# Altium PCB BearlyML Module Board.pcbdoc
Units mil, origin at the board's own origin, x right, y up, seen from the top; angles counter-clockwise.
Board outline 5566.92 x 3205.7 mil, 6 copper layers (Top Layer, Mid-Layer 1, Mid-Layer 2, Mid-Layer 3, Mid-Layer 4, Bottom Layer); 63 components, 67 nets, 774 pads, 281 vias.
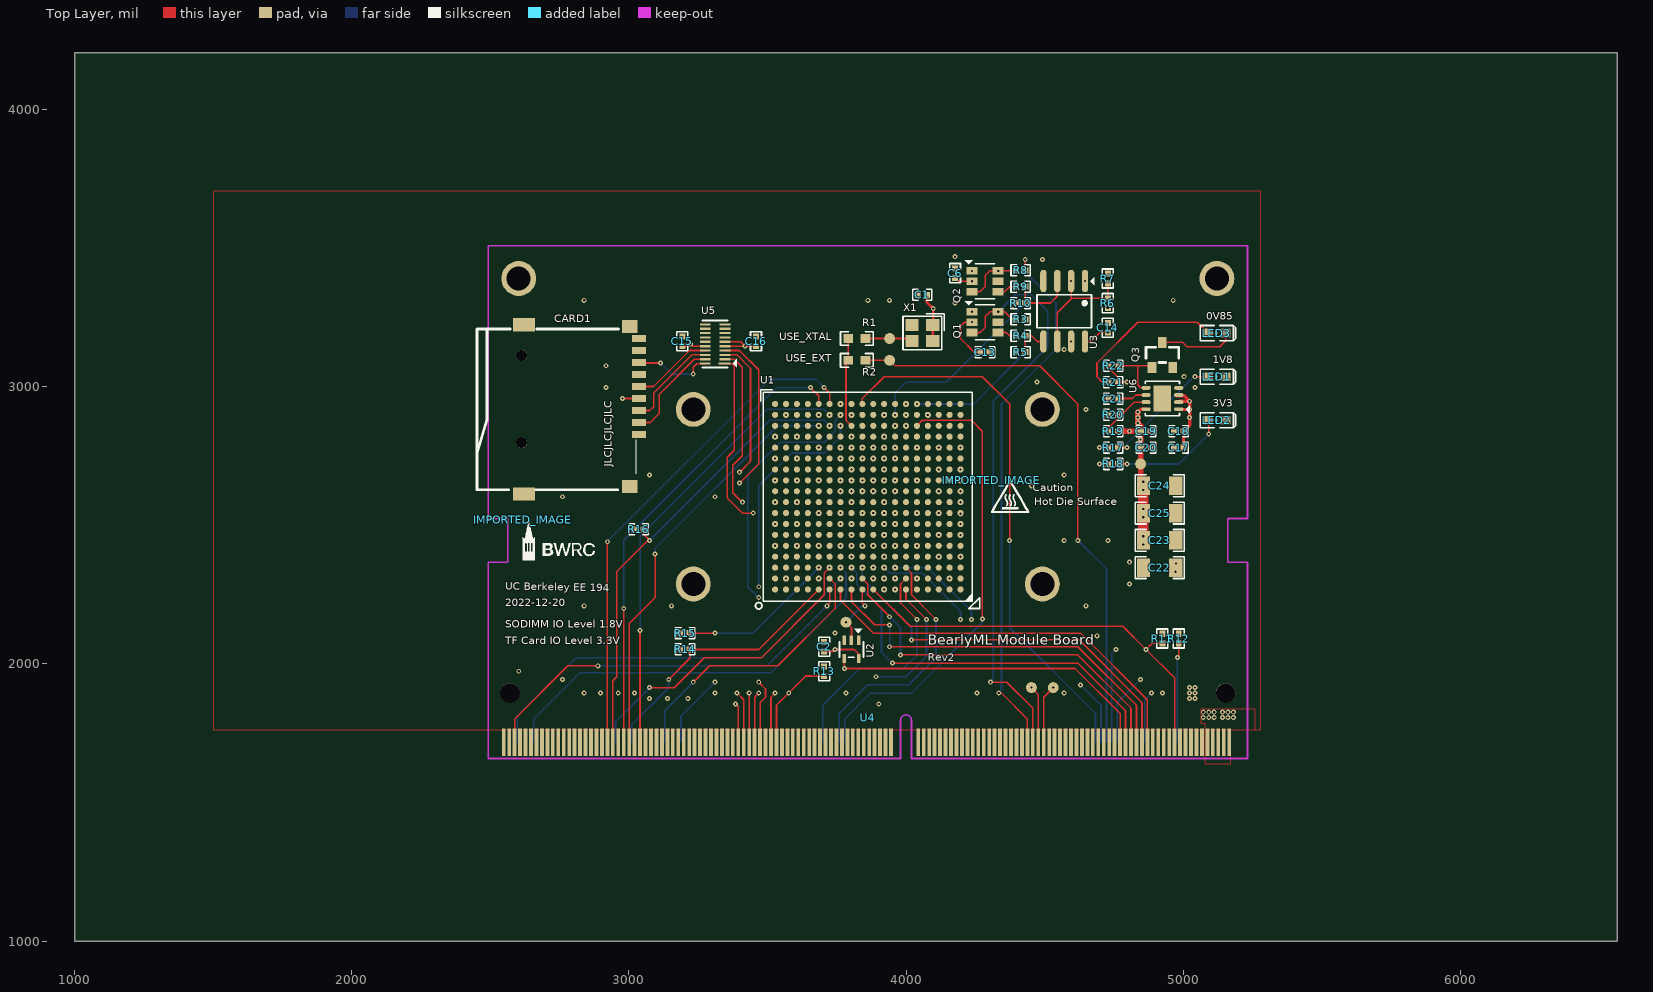
[diagram p0: Top Layer view]
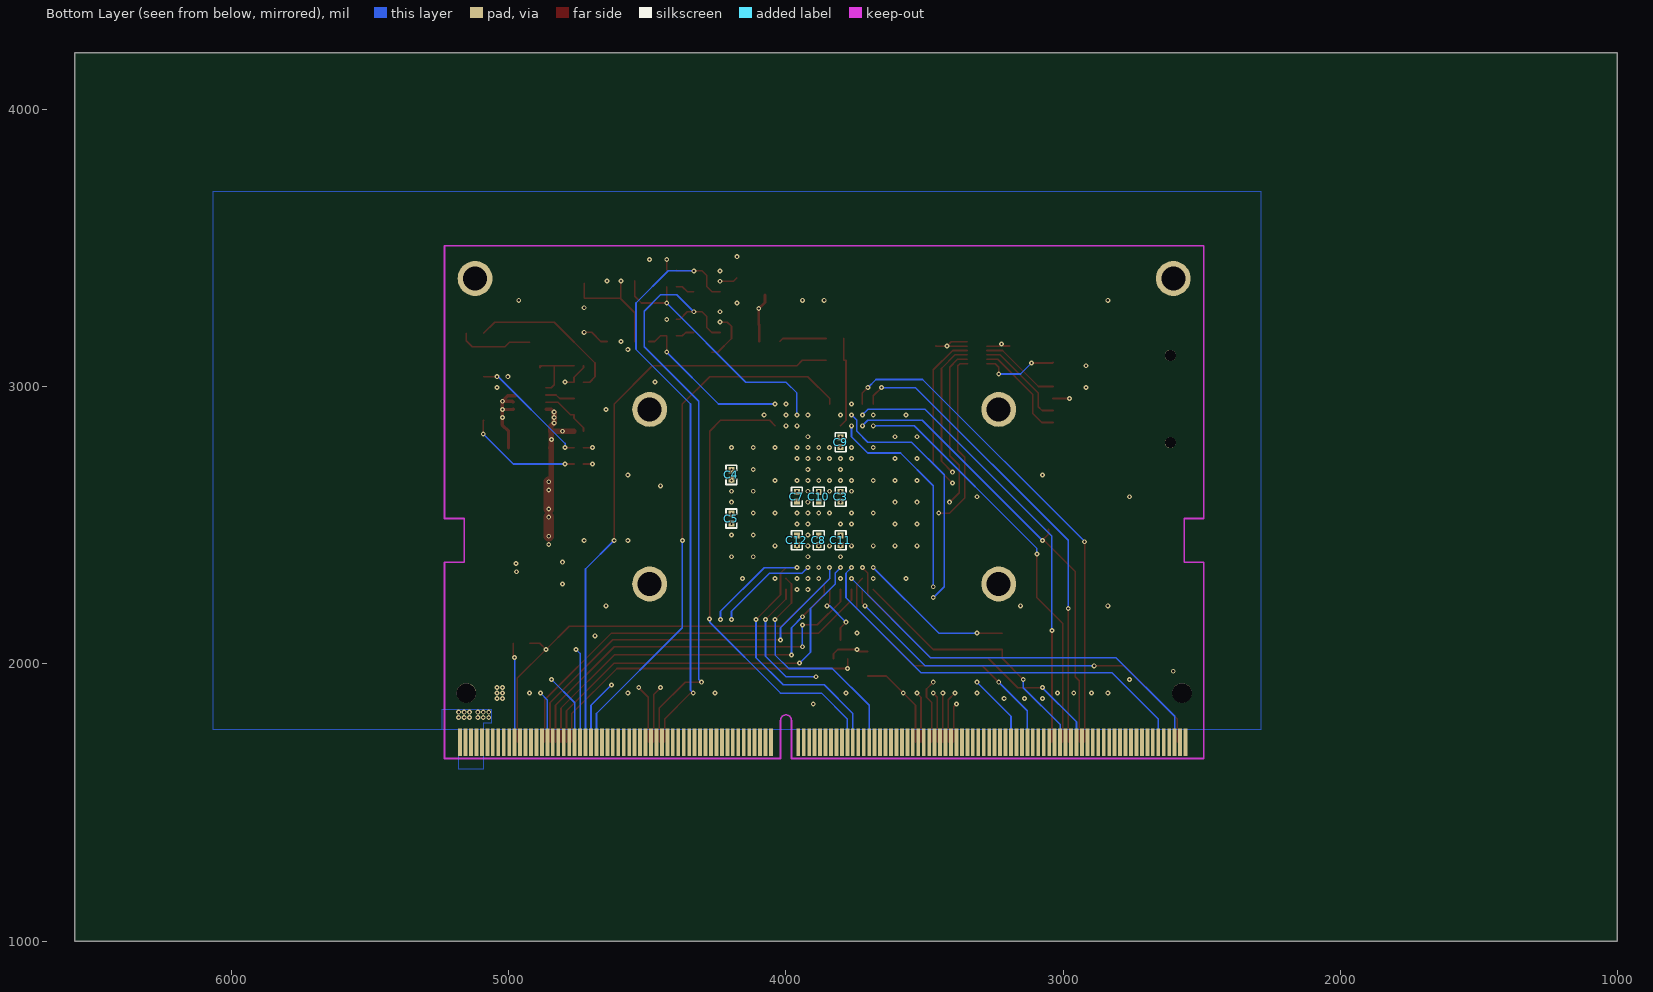
[diagram p1: Bottom Layer view, seen from below]
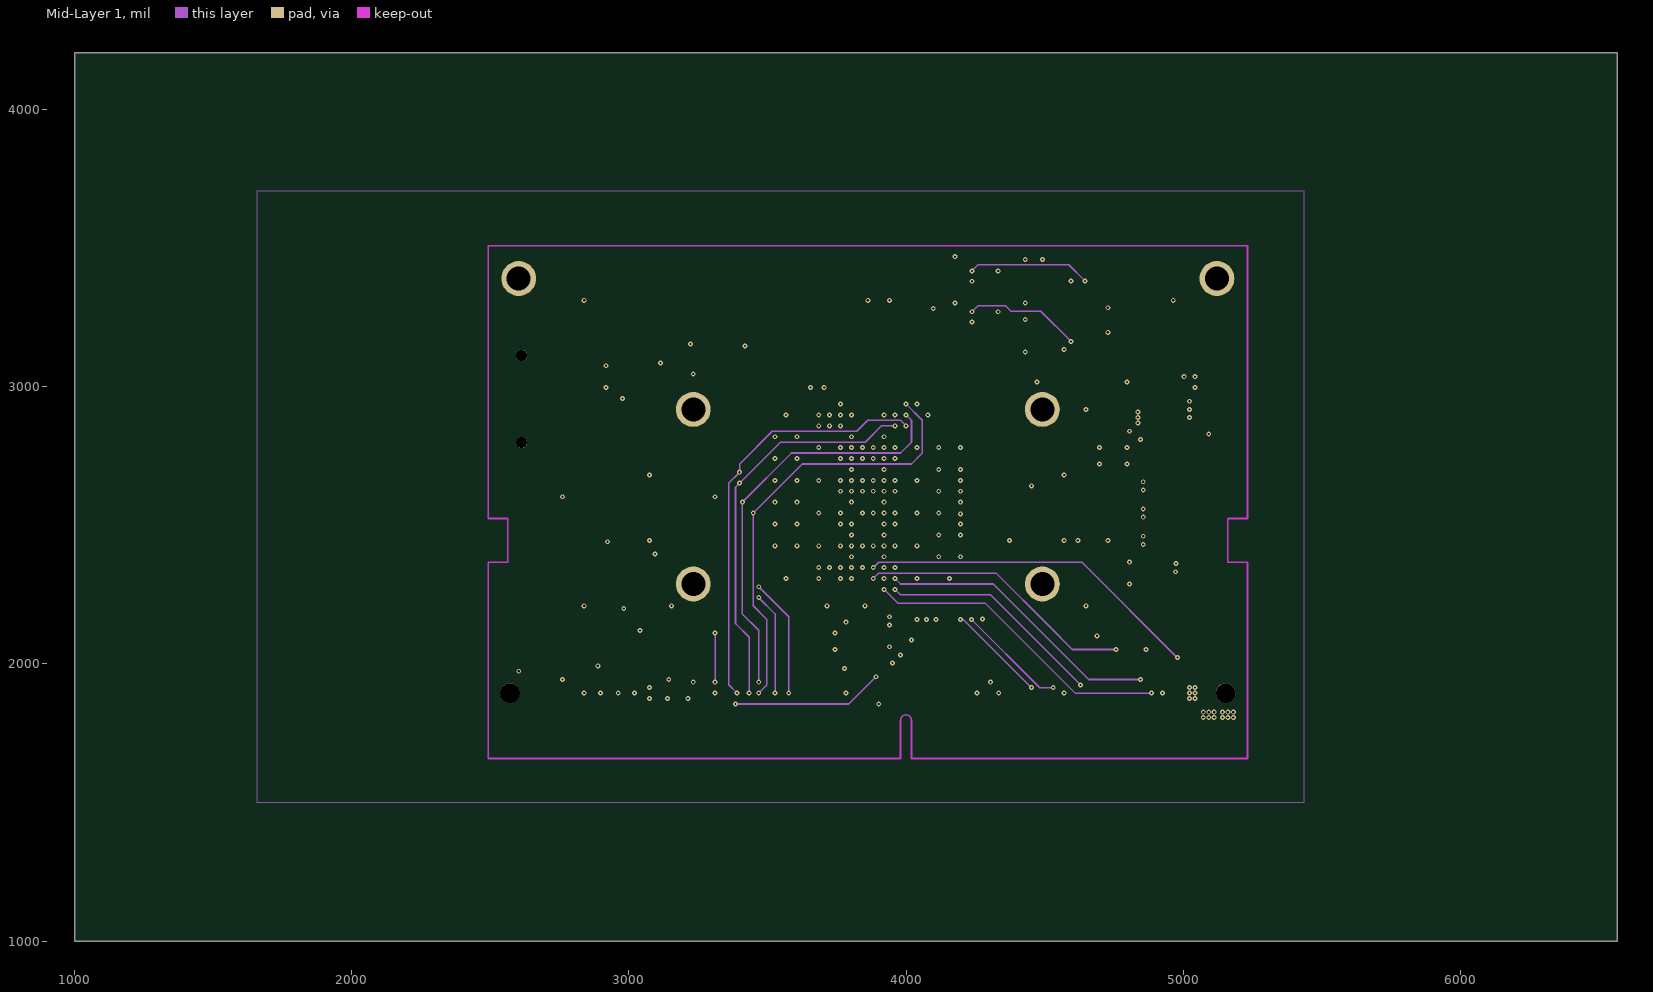
[diagram p2: Mid-Layer 1]
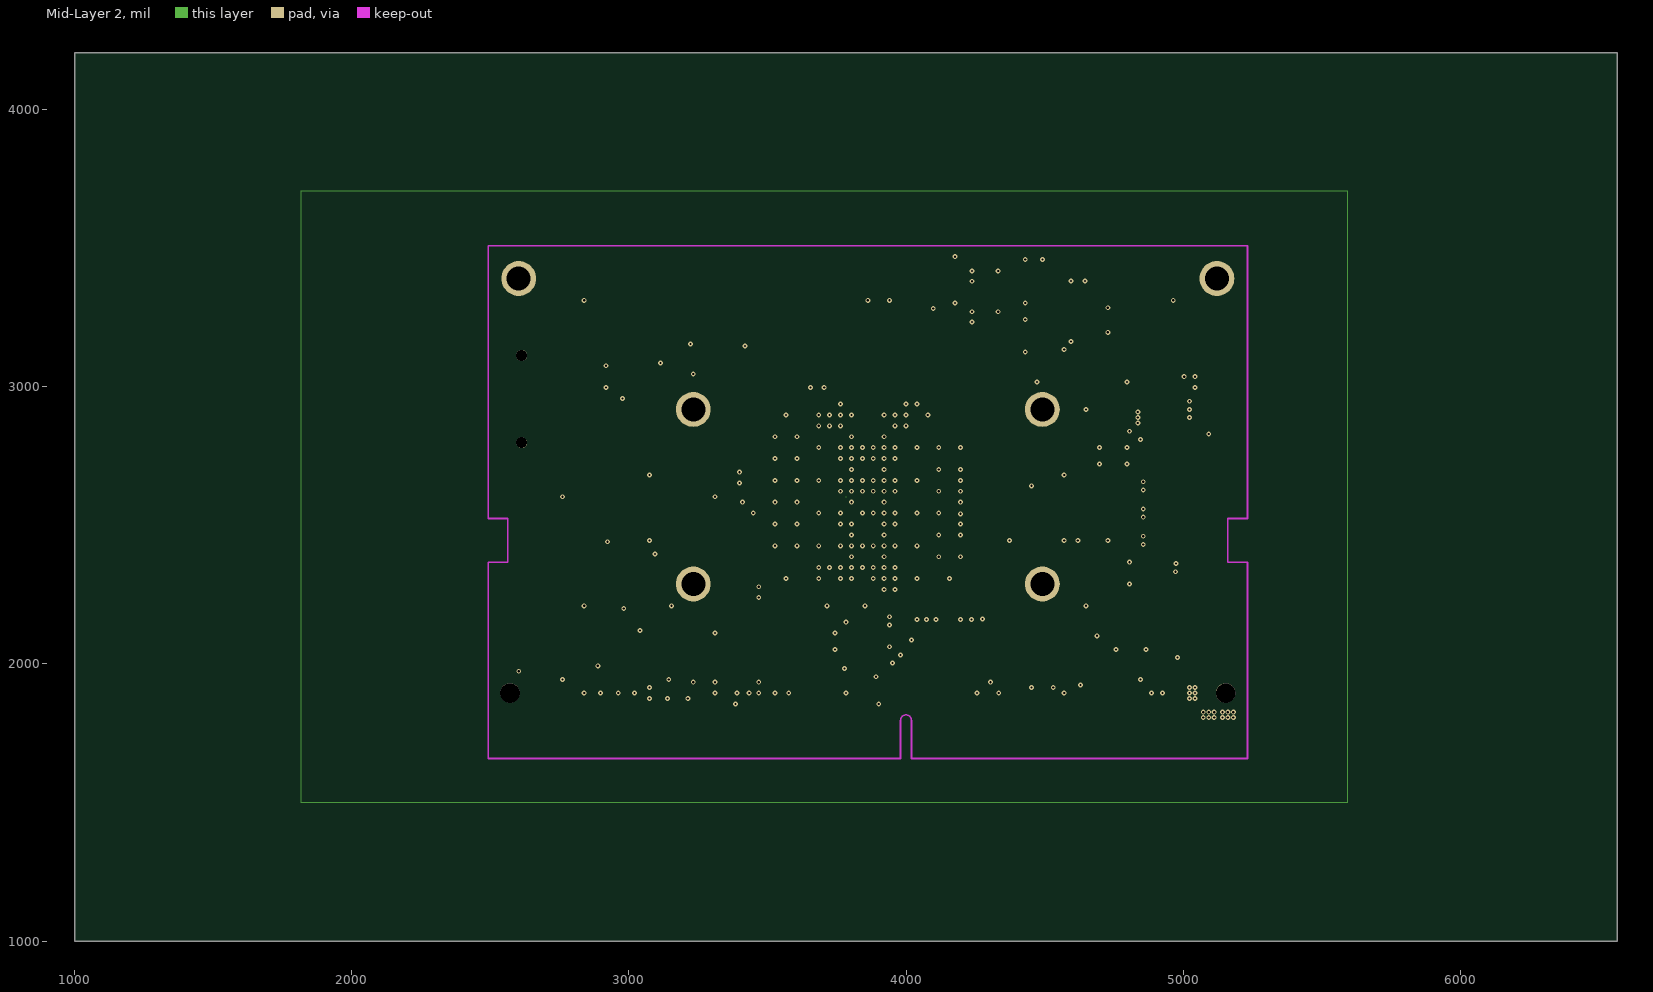
[diagram p3: Mid-Layer 2]
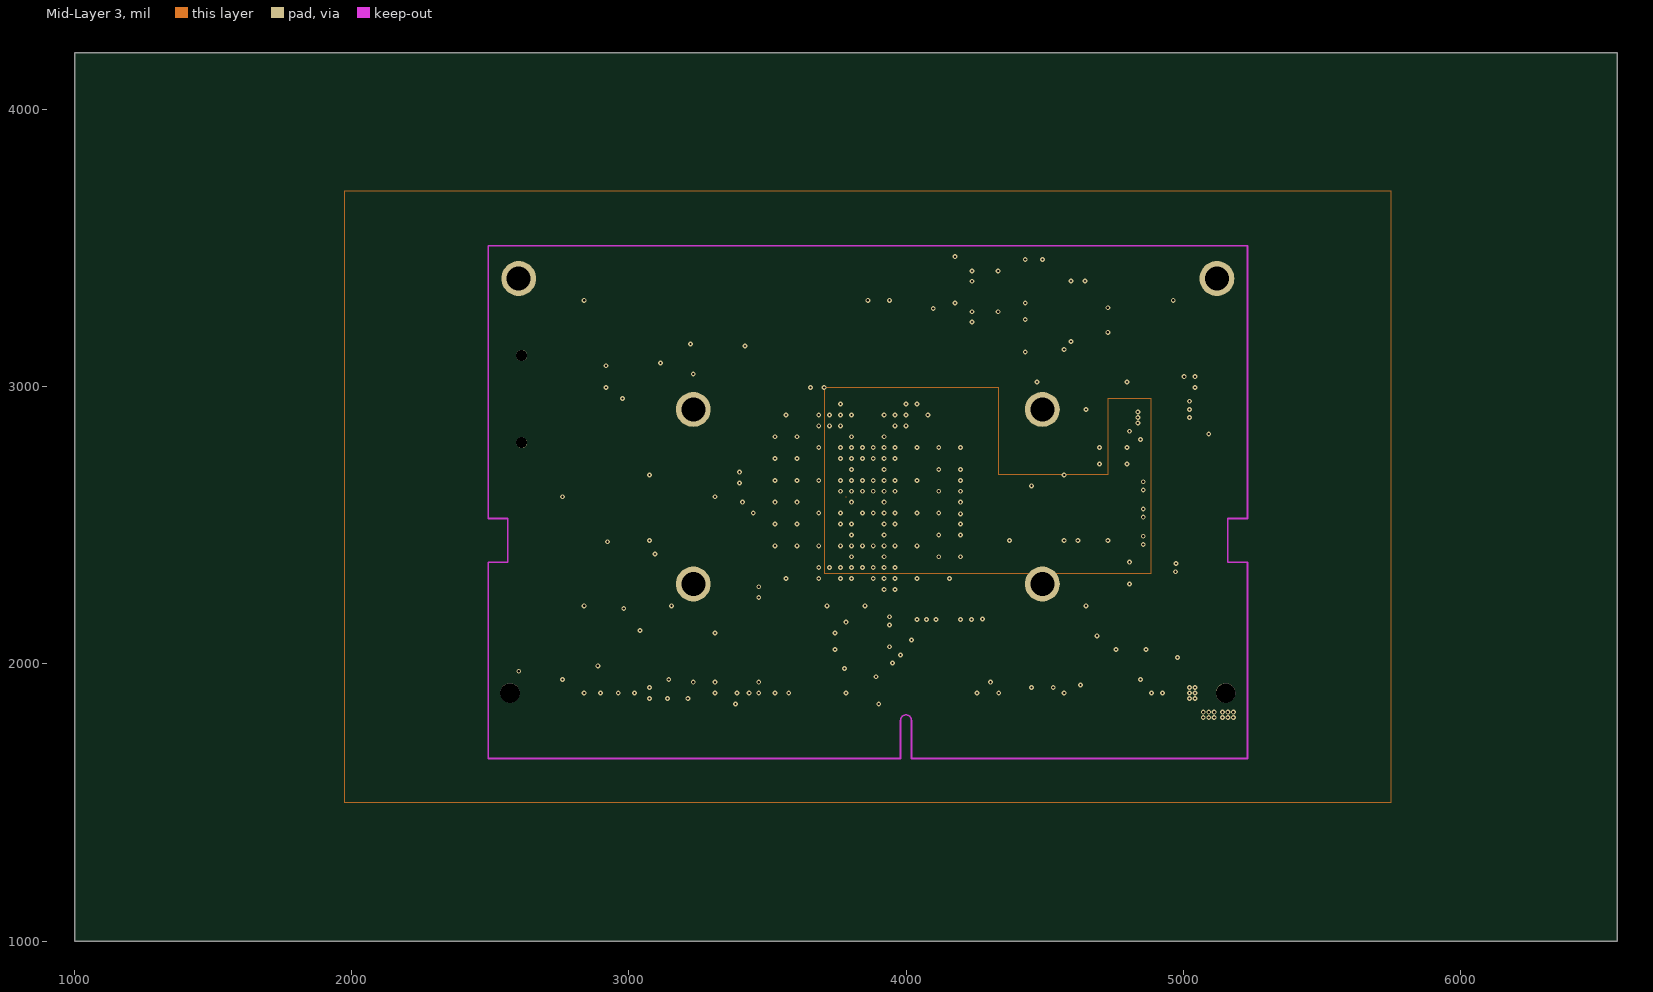
[diagram p4: Mid-Layer 3]
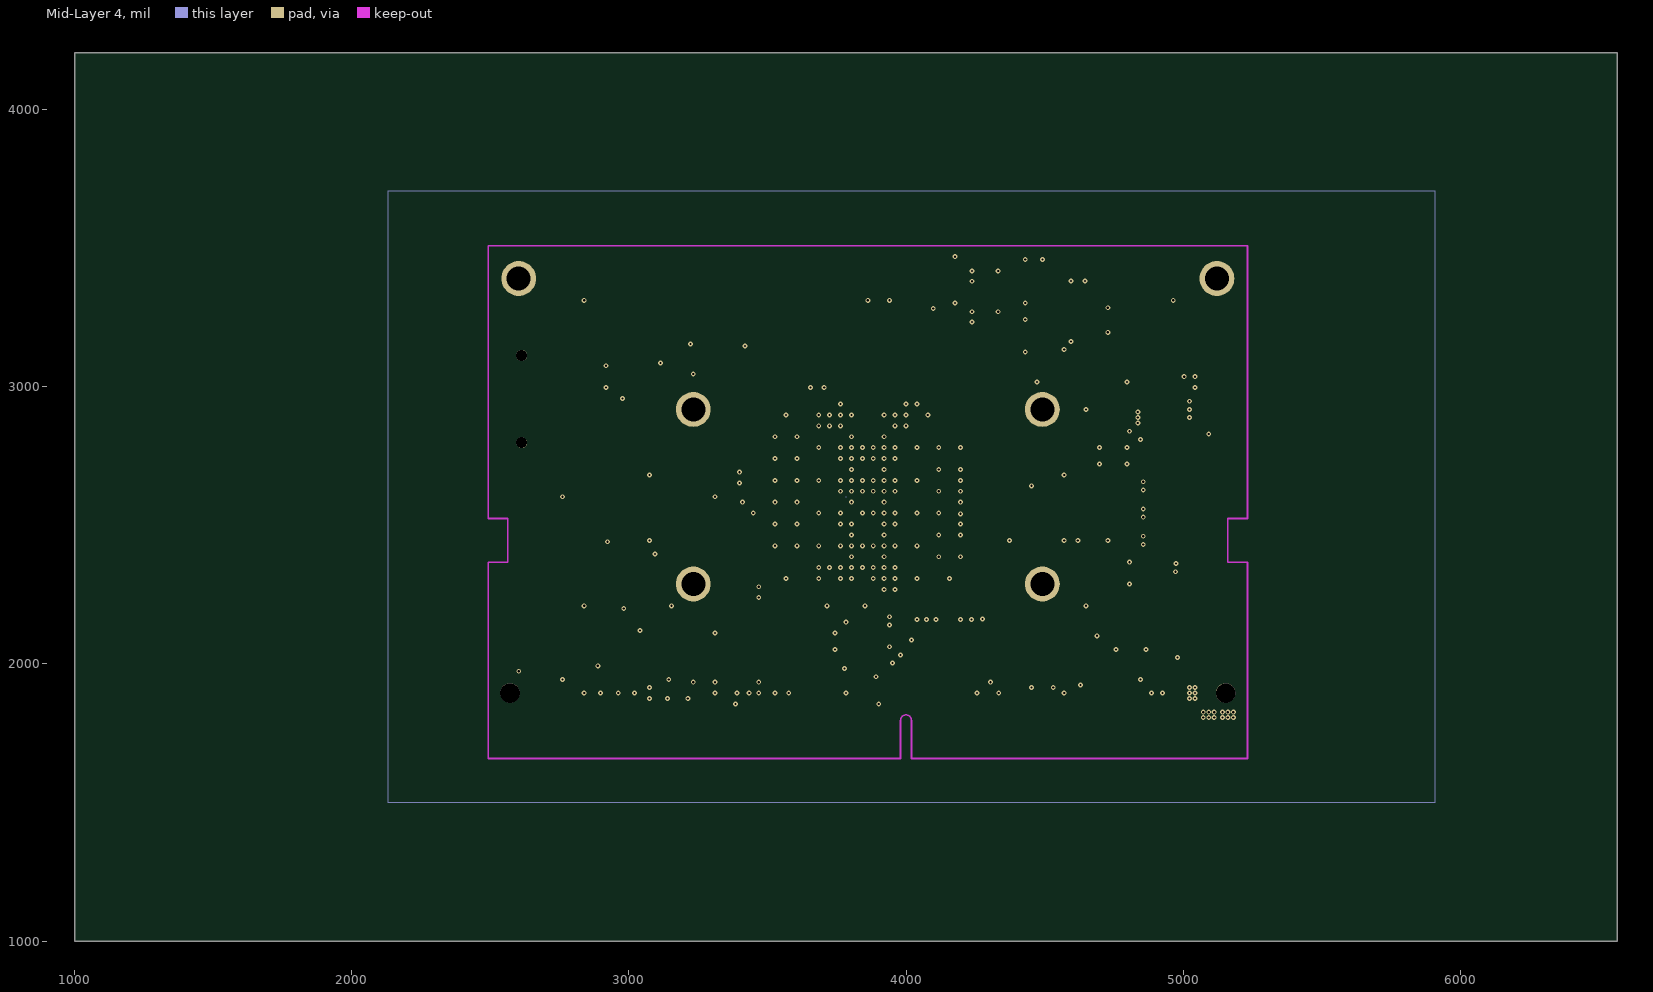
[diagram p5: Mid-Layer 4]

## Layer stack, top to bottom
Top Solder: solder mask 0.4, Solder Resist, Dk 3.5
Top Layer: signal copper 1.4
Dielectric1: dielectric 12.6, FR-4, Dk 4.8
Mid-Layer 1: signal copper 1.4
Dielectric2: dielectric 12.6, FR-4, Dk 4.8
Mid-Layer 2: signal copper 1.4
Dielectric5: dielectric 12.6, FR-4, Dk 4.8
Mid-Layer 3: signal copper 1.4
Dielectric4: dielectric 12.6, FR-4, Dk 4.8
Mid-Layer 4: signal copper 1.4
Dielectric3: dielectric 12.6, FR-4, Dk 4.8
Bottom Layer: signal copper 1.4
Bottom Solder: solder mask 0.4, Solder Resist, Dk 3.5

## Board outline
6566.92,1000 1000,1000 1000,4205.7 6566.92,4205.7

## Design rules (kind name [scope] priority, off if disabled: settings)
Clearance [All] p1: gap=10 ignorepadtopadclearanceinfootprint=FALSE except(0: Arc-Hole Track-Hole SMDPad-Hole THPad-Hole Via-Hole Fill-Hole Poly-Hole Region-Hole Text-Hole)
PolygonConnect [All] p1: connectstyle=Relief reliefconductorwidth=10 reliefentries=4 polygonreliefangle="90 Angle" airgapwidth=10
RoutingVias [All] p1: holewidth=28 width=50 viastyle="Through Hole" minholewidth=28 minwidth=50 maxholewidth=28 maxwidth=50
SolderMaskExpansion [All] p1: expansion=4 istentingtop=FALSE
Width [All] p1: maxlimit=10 minlimit=10 preferedwidth=10
30 further rules are at their usual default settings.

## Components (designator, comment, footprint, x,y, rotation, side; value= is the part's Value field where it differs from the comment)
C1 "100n" CAPA-0402#1 4059.05,3331.69 r0 top
C2 "100n" CAPA-0402#1 3704.7,2062.04 r270 top
C3 "100n" CAPA-0402#2 3803.1,2603.34 r270 bottom
C4 "100n" CAPA-0402#2 4196.8,2682.04 r90 bottom
C5 "100n" CAPA-0402#2 4196.8,2524.64 r90 bottom
C6 "100n" CAPA-0402#1 4177.16,3410.43 r270 top
C7 "100n" CAPA-0402#2 3960.6,2603.34 r270 bottom
C8 "100n" CAPA-0402#2 3881.9,2445.84 r90 bottom
C9 "100n" CAPA-0402#2 3803.1,2800.14 r90 bottom
C10 "1u" CAPA-0402#2 3881.9,2603.34 r270 bottom
C11 "1u" CAPA-0402#2 3803.1,2445.84 r90 bottom
C12 "1u" CAPA-0402#2 3960.6,2445.84 r90 bottom
C13 "100n" CAPA-0402#1 4285.43,3125 r180 top
C14 "100n" CAPA-0402#1 4728.3,3213.54 r270 top
C15 "100n" CAPA-0402#1 3192.9,3164.34 r270 top
C16 "100n" CAPA-0402#1 3458.7,3164.34 r270 top
C17 "10u" CAPA-0402#1 4984.2,2780.54 r0 top
C18 "100n" CAPA-0402#1 4984.2,2839.54 r0 top
C19 "100n" CAPA-0402#1 4866.1,2839.54 r180 top
C20 "10u" CAPA-0402#1 4866.1,2780.54 r180 top
C21 "1n" CAPA-0402#1 4748,2957.64 r0 top
C22 "22u" CAPA-1206 4915.3,2347.44 r0 top
C23 "22u" CAPA-1206 4915.3,2445.84 r180 top
C24 "2u2" CAPA-1206 4915.3,2642.74 r180 top
C25 "2u2" CAPA-1206 4915.3,2544.24 r180 top
CARD1 "TF-01A" TF-SMD_TF-01A 2828.7,2918.35 r270 top
IMPORTED_IMAGE "Comment" IMPORTED_IMAGE 4306.9,2662.93 r0 top
IMPORTED_IMAGE "Comment" IMPORTED_IMAGE 2617.72,2519.84 r0 top
LED1 "LED-0603_B" LED-0603 5122,3036.44 r0 top
LED2 "LED-0603_B" LED-0603 5122,2878.94 r0 top
LED3 "LED-0603_B" LED-0603 5122,3193.84 r0 top
Q1 "AO6604_S" TSOP-6_L3.0-W1.5-P0.95-LS2.8-BR 4285.39,3233.25 r180 top
Q2 "AO6604_S" TSOP-6_L3.0-W1.5-P0.95-LS2.8-BR 4285.39,3380.95 r180 top
Q3 "FDV301N" SOT-23_L2.9-W1.3-P1.90-LS2.4-BR 4925.16,3115.14 r270 top
R1 "0R" RES-0603 3822.83,3174.21 r0 top
R2 "0R" RES-0603 3822.83,3095.47 r0 top
R3 "1k" RES-0402 4413.38,3243.11 r0 top
R4 "1k" RES-0402 4413.4,3184.04 r180 top
R5 "2k" RES-0402 4413.4,3125.04 r0 top
R6 "1k" RES-0402 4728.3,3302.14 r270 top
R7 "10k" RES-0402 4728.3,3390.74 r270 top
R8 "1k" RES-0402 4413.4,3420.24 r0 top
R9 "1k" RES-0402 4413.4,3361.24 r180 top
R10 "2k" RES-0402 4413.4,3302.14 r0 top
R11 "100k" RES-0402 4925.2,2091.54 r90 top
R12 "100k" RES-0402 4984.2,2091.54 r90 top
R13 "100k" RES-0402 3704.7,1973.44 r90 top
R14 "100k" RES-0402 3202.8,2052.14 r180 top
R15 "100k" RES-0402 3202.8,2111.24 r180 top
R16 "100k" RES-0402 3035.4,2485.24 r180 top
R17 "1k" RES-0402 4748,2780.54 r180 top
R18 "1k" RES-0402 4748,2721.44 r180 top
R19 "130k" RES-0402 4748,2839.54 r0 top
R20 "120k" RES-0402 4748,2898.64 r0 top
R21 "1k" RES-0402 4748,3016.74 r0 top
R22 "10k" RES-0402 4748,3075.74 r180 top
U1 "BearlyML" FC-PBGA-1.0-324-R18-C18_INTEL 3862.2,2603.34 r0 top
U2 "SN74LVC1G04DCKR" SOT-353_L2.1-W1.3-P0.65-LS2.3-BR 3803.1,2052.14 r90 top
U3 "TLV3202AIDR_S" SOIC-8_L5.0-W4.0-P1.27-LS6.0-BL 4570.9,3272.64 r180 top
U4 "SODIMM" "SODIMM 260" 3862.2,1658.44 r0 top
U5 "TXB0108DQSR" SON-20_L4.0-W2.0-P0.40-BL 3311.07,3154.48 r90 top
U6 "MCP1726-ADJE/MF" TDFN-8_L3.0-W3.0-P0.65-BL-EP 4925.2,2957.64 r90 top
X1 "20MHz" OSC-SMD_4P-L2.5-W2.0-BL 4059.05,3193.89 r180 top

## Footprints (in the part's own frame and the unit in brackets; to place one, negate y for a bottom-side part, rotate by r counter-clockwise, add the part's x,y. Pads: shape width x height; smd on the part's side, far side on the other; paste and mask are expansions set on the pad)
CAPA-0402#1 [mm]
  rect 0.566x0.54 smd paste-100 mask+0.051: 1(-0.433,0) 2(0.433,0)
  silkscreen extent -0.87,-0.5 0.87,0.5
CAPA-0402#2 [mm]
  rect 0.566x0.54 smd paste-100 mask+0.051: 1(0.433,0) 2(-0.433,0)
  silkscreen extent -0.87,-0.5 0.87,0.5
CAPA-1206 [mil]
  rect 47.54x66.97 smd paste-3937.01 mask+2: 1(-58.22,0) 2(58.22,0)
  silkscreen extent -89,-39 89,39
FC-PBGA-1.0-324-R18-C18_INTEL [mm]
  round 0.56 smd paste-100 mask+0.051: A1(-8.5,8.5) A2(-7.5,8.5) A3(-6.5,8.5) A4(-5.5,8.5) A5(-4.5,8.5) A6(-3.5,8.5) A7(-2.5,8.5) A8(-1.5,8.5) A9(-0.5,8.5) A10(0.5,8.5) A11(1.5,8.5) A12(2.5,8.5) A13(3.5,8.5) A14(4.5,8.5) A15(5.5,8.5) A16(6.5,8.5) A17(7.5,8.5) A18(8.5,8.5) B1(-8.5,7.5) B2(-7.5,7.5) B3(-6.5,7.5) B4(-5.5,7.5) B5(-4.5,7.5) B6(-3.5,7.5) B7(-2.5,7.5) B8(-1.5,7.5) B9(-0.5,7.5) B10(0.5,7.5) B11(1.5,7.5) B12(2.5,7.5) B13(3.5,7.5) B14(4.5,7.5) B15(5.5,7.5) B16(6.5,7.5) B17(7.5,7.5) B18(8.5,7.5) C1(-8.5,6.5) C2(-7.5,6.5) C3(-6.5,6.5) C4(-5.5,6.5) C5(-4.5,6.5) C6(-3.5,6.5) C7(-2.5,6.5) C8(-1.5,6.5) C9(-0.5,6.5) C10(0.5,6.5) C11(1.5,6.5) C12(2.5,6.5) C13(3.5,6.5) C14(4.5,6.5) C15(5.5,6.5) C16(6.5,6.5) C17(7.5,6.5) C18(8.5,6.5) D1(-8.5,5.5) D2(-7.5,5.5) D3(-6.5,5.5) D4(-5.5,5.5) D5(-4.5,5.5) D6(-3.5,5.5) D7(-2.5,5.5) D8(-1.5,5.5) D9(-0.5,5.5) D10(0.5,5.5) D11(1.5,5.5) D12(2.5,5.5) D13(3.5,5.5) D14(4.5,5.5) D15(5.5,5.5) D16(6.5,5.5) D17(7.5,5.5) D18(8.5,5.5) E1(-8.5,4.5) E2(-7.5,4.5) E3(-6.5,4.5) E4(-5.5,4.5) E5(-4.5,4.5) E6(-3.5,4.5) E7(-2.5,4.5) E8(-1.5,4.5) E9(-0.5,4.5) E10(0.5,4.5) E11(1.5,4.5) E12(2.5,4.5) E13(3.5,4.5) E14(4.5,4.5) E15(5.5,4.5) E16(6.5,4.5) E17(7.5,4.5) E18(8.5,4.5) F1(-8.5,3.5) F2(-7.5,3.5) F3(-6.5,3.5) F4(-5.5,3.5) F5(-4.5,3.5) F6(-3.5,3.5) F7(-2.5,3.5) F8(-1.5,3.5) F9(-0.5,3.5) F10(0.5,3.5) F11(1.5,3.5) F12(2.5,3.5) F13(3.5,3.5) F14(4.5,3.5) F15(5.5,3.5) F16(6.5,3.5) F17(7.5,3.5) F18(8.5,3.5) G1(-8.5,2.5) G2(-7.5,2.5) G3(-6.5,2.5) G4(-5.5,2.5) G5(-4.5,2.5) G6(-3.5,2.5) G7(-2.5,2.5) G8(-1.5,2.5) G9(-0.5,2.5) G10(0.5,2.5) G11(1.5,2.5) G12(2.5,2.5) G13(3.5,2.5) G14(4.5,2.5) G15(5.5,2.5) G16(6.5,2.5) G17(7.5,2.5) G18(8.5,2.5) H1(-8.5,1.5) H2(-7.5,1.5) H3(-6.5,1.5) H4(-5.5,1.5) H5(-4.5,1.5) H6(-3.5,1.5) H7(-2.5,1.5) H8(-1.5,1.5) H9(-0.5,1.5) H10(0.5,1.5) H11(1.5,1.5) H12(2.5,1.5) H13(3.5,1.5) H14(4.5,1.5) H15(5.5,1.5) H16(6.5,1.5) H17(7.5,1.5) H18(8.5,1.5) J1(-8.5,0.5) J2(-7.5,0.5) J3(-6.5,0.5) J4(-5.5,0.5) J5(-4.5,0.5) J6(-3.5,0.5) J7(-2.5,0.5) J8(-1.5,0.5) J9(-0.5,0.5) J10(0.5,0.5) J11(1.5,0.5) J12(2.5,0.5) J13(3.5,0.5) J14(4.5,0.5) J15(5.5,0.5) J16(6.5,0.5) J17(7.5,0.5) J18(8.5,0.5) K1(-8.5,-0.5) K2(-7.5,-0.5) K3(-6.5,-0.5) K4(-5.5,-0.5) K5(-4.5,-0.5) K6(-3.5,-0.5) K7(-2.5,-0.5) K8(-1.5,-0.5) K9(-0.5,-0.5) K10(0.5,-0.5) K11(1.5,-0.5) K12(2.5,-0.5) K13(3.5,-0.5) K14(4.5,-0.5) K15(5.5,-0.5) K16(6.5,-0.5) K17(7.5,-0.5) K18(8.5,-0.5) L1(-8.5,-1.5) L2(-7.5,-1.5) L3(-6.5,-1.5) L4(-5.5,-1.5) L5(-4.5,-1.5) L6(-3.5,-1.5) L7(-2.5,-1.5) L8(-1.5,-1.5) L9(-0.5,-1.5) L10(0.5,-1.5) L11(1.5,-1.5) L12(2.5,-1.5) L13(3.5,-1.5) L14(4.5,-1.5) L15(5.5,-1.5) L16(6.5,-1.5) L17(7.5,-1.5) L18(8.5,-1.5) M1(-8.5,-2.5) M2(-7.5,-2.5) M3(-6.5,-2.5) M4(-5.5,-2.5) M5(-4.5,-2.5) M6(-3.5,-2.5) M7(-2.5,-2.5) M8(-1.5,-2.5) M9(-0.5,-2.5) M10(0.5,-2.5) M11(1.5,-2.5) M12(2.5,-2.5) M13(3.5,-2.5) M14(4.5,-2.5) M15(5.5,-2.5) M16(6.5,-2.5) M17(7.5,-2.5) M18(8.5,-2.5) N1(-8.5,-3.5) N2(-7.5,-3.5) N3(-6.5,-3.5) N4(-5.5,-3.5) N5(-4.5,-3.5) N6(-3.5,-3.5) N7(-2.5,-3.5) N8(-1.5,-3.5) N9(-0.5,-3.5) N10(0.5,-3.5) N11(1.5,-3.5) N12(2.5,-3.5) N13(3.5,-3.5) N14(4.5,-3.5) N15(5.5,-3.5) N16(6.5,-3.5) N17(7.5,-3.5) N18(8.5,-3.5) P1(-8.5,-4.5) P2(-7.5,-4.5) P3(-6.5,-4.5) P4(-5.5,-4.5) P5(-4.5,-4.5) P6(-3.5,-4.5) P7(-2.5,-4.5) P8(-1.5,-4.5) P9(-0.5,-4.5) P10(0.5,-4.5) P11(1.5,-4.5) P12(2.5,-4.5) P13(3.5,-4.5) P14(4.5,-4.5) P15(5.5,-4.5) P16(6.5,-4.5) P17(7.5,-4.5) P18(8.5,-4.5) R1(-8.5,-5.5) R2(-7.5,-5.5) R3(-6.5,-5.5) R4(-5.5,-5.5) R5(-4.5,-5.5) R6(-3.5,-5.5) R7(-2.5,-5.5) R8(-1.5,-5.5) R9(-0.5,-5.5) R10(0.5,-5.5) R11(1.5,-5.5) R12(2.5,-5.5) R13(3.5,-5.5) R14(4.5,-5.5) R15(5.5,-5.5) R16(6.5,-5.5) R17(7.5,-5.5) R18(8.5,-5.5) T1(-8.5,-6.5) T2(-7.5,-6.5) T3(-6.5,-6.5) T4(-5.5,-6.5) T5(-4.5,-6.5) T6(-3.5,-6.5) T7(-2.5,-6.5) T8(-1.5,-6.5) T9(-0.5,-6.5) T10(0.5,-6.5) T11(1.5,-6.5) T12(2.5,-6.5) T13(3.5,-6.5) T14(4.5,-6.5) T15(5.5,-6.5) T16(6.5,-6.5) T17(7.5,-6.5) T18(8.5,-6.5) U1(-8.5,-7.5) U2(-7.5,-7.5) U3(-6.5,-7.5) U4(-5.5,-7.5) U5(-4.5,-7.5) U6(-3.5,-7.5) U7(-2.5,-7.5) U8(-1.5,-7.5) U9(-0.5,-7.5) U10(0.5,-7.5) U11(1.5,-7.5) U12(2.5,-7.5) U13(3.5,-7.5) U14(4.5,-7.5) U15(5.5,-7.5) U16(6.5,-7.5) U17(7.5,-7.5) U18(8.5,-7.5) V1(-8.5,-8.5) V2(-7.5,-8.5) V3(-6.5,-8.5) V4(-5.5,-8.5) V5(-4.5,-8.5) V6(-3.5,-8.5) V7(-2.5,-8.5) V8(-1.5,-8.5) V9(-0.5,-8.5) V10(0.5,-8.5) V11(1.5,-8.5) V12(2.5,-8.5) V13(3.5,-8.5) V14(4.5,-8.5) V15(5.5,-8.5) V16(6.5,-8.5) V17(7.5,-8.5) V18(8.5,-8.5)
  silkscreen extent -10.3,-10.3 10.25,9.8
IMPORTED_IMAGE [mil]
  silkscreen extent 0,-118 138,0
LED-0603 [mm]
  rect 0.9x0.8 smd paste+0 mask+0.102: 1(-0.8,0) 2(0.8,0)
  silkscreen extent -1.51,-0.69 1.7,0.69
OSC-SMD_4P-L2.5-W2.0-BL [mm]
  rect 1.2x1.1 smd paste+0 mask+0.051: 1(-0.95,-0.75) 2(0.95,-0.75) 3(0.95,0.75) 4(-0.95,0.75)
  silkscreen extent -2.01,-1.76 1.78,1.53
RES-0402 [mm]
  rect 0.566x0.54 smd paste-100 mask+0.051: 1(-0.433,0) 2(0.433,0)
  silkscreen extent -0.87,-0.5 0.87,0.5
RES-0603 [mm]
  rect 0.9x0.8 smd paste+0 mask+0.051: 1(-0.8,0) 2(0.8,0)
  silkscreen extent -1.5,-0.62 1.5,0.62
"SODIMM 260" [mm]
  rect 0.35x2.5 smd paste+0 mask+0.051: 1(-33.375,1.5) 3(-32.875,1.5) 5(-32.375,1.5) 7(-31.875,1.5) 9(-31.375,1.5) 11(-30.875,1.5) 13(-30.375,1.5) 15(-29.875,1.5) 17(-29.375,1.5) 19(-28.875,1.5) 21(-28.375,1.5) 23(-27.875,1.5) 25(-27.375,1.5) 27(-26.875,1.5) 29(-26.375,1.5) 31(-25.875,1.5) 33(-25.375,1.5) 35(-24.875,1.5) 37(-24.375,1.5) 39(-23.875,1.5) 41(-23.375,1.5) 43(-22.875,1.5) 45(-22.375,1.5) 47(-21.875,1.5) 49(-21.375,1.5) 51(-20.875,1.5) 53(-20.375,1.5) 55(-19.875,1.5) 57(-19.375,1.5) 59(-18.875,1.5) 61(-18.375,1.5) 63(-17.875,1.5) 65(-17.375,1.5) 67(-16.875,1.5) 69(-16.375,1.5) 71(-15.875,1.5) 73(-15.375,1.5) 75(-14.875,1.5) 77(-14.375,1.5) 79(-13.875,1.5) 81(-13.375,1.5) 83(-12.875,1.5) 85(-12.375,1.5) 87(-11.875,1.5) 89(-11.375,1.5) 91(-10.875,1.5) 93(-10.375,1.5) 95(-9.875,1.5) 97(-9.375,1.5) 99(-8.875,1.5) 101(-8.375,1.5) 103(-7.875,1.5) 105(-7.375,1.5) 107(-6.875,1.5) 109(-6.375,1.5) 111(-5.875,1.5) 113(-5.375,1.5) 115(-4.875,1.5) 117(-4.375,1.5) 119(-3.875,1.5) 121(-3.375,1.5) 123(-2.875,1.5) 125(-2.375,1.5) 127(-1.875,1.5) 129(-1.375,1.5) 131(-0.875,1.5) 133(-0.375,1.5) 135(0.125,1.5) 137(0.625,1.5) 139(1.125,1.5) 141(1.625,1.5) 143(2.125,1.5) 145(4.625,1.5) 147(5.125,1.5) 149(5.625,1.5) 151(6.125,1.5) 153(6.625,1.5) 155(7.125,1.5) 157(7.625,1.5) 159(8.125,1.5) 161(8.625,1.5) 163(9.125,1.5) 165(9.625,1.5) 167(10.125,1.5) 169(10.625,1.5) 171(11.125,1.5) 173(11.625,1.5) 175(12.125,1.5) 177(12.625,1.5) 179(13.125,1.5) 181(13.625,1.5) 183(14.125,1.5) 185(14.625,1.5) 187(15.125,1.5) 189(15.625,1.5) 191(16.125,1.5) 193(16.625,1.5) 195(17.125,1.5) 197(17.625,1.5) 199(18.125,1.5) 201(18.625,1.5) 203(19.125,1.5) 205(19.625,1.5) 207(20.125,1.5) 209(20.625,1.5) 211(21.125,1.5) 213(21.625,1.5) 215(22.125,1.5) 217(22.625,1.5) 219(23.125,1.5) 221(23.625,1.5) 223(24.125,1.5) 225(24.625,1.5) 227(25.125,1.5) 229(25.625,1.5) 231(26.125,1.5) 233(26.625,1.5) 235(27.125,1.5) 237(27.625,1.5) 239(28.125,1.5) 241(28.625,1.5) 243(29.125,1.5) 245(29.625,1.5) 247(30.125,1.5) 249(30.625,1.5) 251(31.125,1.5) 253(31.625,1.5) 255(32.125,1.5) 257(32.625,1.5) 259(33.125,1.5)
  rect 0.35x2.5 smd far side paste+0 mask+0.051: 2(-33.125,1.5) 4(-32.625,1.5) 6(-32.125,1.5) 8(-31.625,1.5) 10(-31.125,1.5) 12(-30.625,1.5) 14(-30.125,1.5) 16(-29.625,1.5) 18(-29.125,1.5) 20(-28.625,1.5) 22(-28.125,1.5) 24(-27.625,1.5) 26(-27.125,1.5) 28(-26.625,1.5) 30(-26.125,1.5) 32(-25.625,1.5) 34(-25.125,1.5) 36(-24.625,1.5) 38(-24.125,1.5) 40(-23.625,1.5) 42(-23.125,1.5) 44(-22.625,1.5) 46(-22.125,1.5) 48(-21.625,1.5) 50(-21.125,1.5) 52(-20.625,1.5) 54(-20.125,1.5) 56(-19.625,1.5) 58(-19.125,1.5) 60(-18.625,1.5) 62(-18.125,1.5) 64(-17.625,1.5) 66(-17.125,1.5) 68(-16.625,1.5) 70(-16.125,1.5) 72(-15.625,1.5) 74(-15.125,1.5) 76(-14.625,1.5) 78(-14.125,1.5) 80(-13.625,1.5) 82(-13.125,1.5) 84(-12.625,1.5) 86(-12.125,1.5) 88(-11.625,1.5) 90(-11.125,1.5) 92(-10.625,1.5) 94(-10.125,1.5) 96(-9.625,1.5) 98(-9.125,1.5) 100(-8.625,1.5) 102(-8.125,1.5) 104(-7.625,1.5) 106(-7.125,1.5) 108(-6.625,1.5) 110(-6.125,1.5) 112(-5.625,1.5) 114(-5.125,1.5) 116(-4.625,1.5) 118(-4.125,1.5) 120(-3.625,1.5) 122(-3.125,1.5) 124(-2.625,1.5) 126(-2.125,1.5) 128(-1.625,1.5) 130(-1.125,1.5) 132(-0.625,1.5) 134(-0.125,1.5) 136(0.375,1.5) 138(0.875,1.5) 140(1.375,1.5) 142(1.875,1.5) 144(2.375,1.5) 146(4.875,1.5) 148(5.375,1.5) 150(5.875,1.5) 152(6.375,1.5) 154(6.875,1.5) 156(7.375,1.5) 158(7.875,1.5) 160(8.375,1.5) 162(8.875,1.5) 164(9.375,1.5) 166(9.875,1.5) 168(10.375,1.5) 170(10.875,1.5) 172(11.375,1.5) 174(11.875,1.5) 176(12.375,1.5) 178(12.875,1.5) 180(13.375,1.5) 182(13.875,1.5) 184(14.375,1.5) 186(14.875,1.5) 188(15.375,1.5) 190(15.875,1.5) 192(16.375,1.5) 194(16.875,1.5) 196(17.375,1.5) 198(17.875,1.5) 200(18.375,1.5) 202(18.875,1.5) 204(19.375,1.5) 206(19.875,1.5) 208(20.375,1.5) 210(20.875,1.5) 212(21.375,1.5) 214(21.875,1.5) 216(22.375,1.5) 218(22.875,1.5) 220(23.375,1.5) 222(23.875,1.5) 224(24.375,1.5) 226(24.875,1.5) 228(25.375,1.5) 230(25.875,1.5) 232(26.375,1.5) 234(26.875,1.5) 236(27.375,1.5) 238(27.875,1.5) 240(28.375,1.5) 242(28.875,1.5) 244(29.375,1.5) 246(29.875,1.5) 248(30.375,1.5) 250(30.875,1.5) 252(31.375,1.5) 254(31.875,1.5) 256(32.375,1.5) 258(32.875,1.5) 260(33.375,1.5)
  round 1.8 hole 1.8 unplated paste+0: ""(-32.8,6) ""(32.8,6)
SOIC-8_L5.0-W4.0-P1.27-LS6.0-BL [mm]
  oval 0.588x2.045 smd paste+0 mask+0.051: 1(-1.905,-2.773) 2(-0.635,-2.773) 3(0.635,-2.773) 4(1.905,-2.773) 5(1.905,2.773) 6(0.635,2.773) 7(-0.635,2.773) 8(-1.905,2.773)
  silkscreen extent -2.75,-3.12 2.5,1.5
SON-20_L4.0-W2.0-P0.40-BL [mm]
  rect 0.2x1.1 smd paste+0 mask+0.051: 1(-1.8,-0.85)
  rect 0.2x1 smd paste+0 mask+0.051: 2(-1.4,-0.9) 3(-1,-0.9) 4(-0.6,-0.9) 5(-0.2,-0.9) 6(0.2,-0.9) 7(0.6,-0.9) 8(1,-0.9) 9(1.4,-0.9) 10(1.8,-0.9) 11(1.8,0.9) 12(1.4,0.9) 13(1,0.9) 14(0.6,0.9) 15(0.2,0.9) 16(-0.2,0.9) 17(-0.6,0.9) 18(-1,0.9) 19(-1.4,0.9) 20(-1.8,0.9)
  silkscreen extent -2.16,-2 2.16,1.14
SOT-23_L2.9-W1.3-P1.90-LS2.4-BR [mm]
  rect 1x0.8 smd paste+0 mask+0.051: 1(1.15,-0.95) 2(1.15,0.95) 3(-1.15,0)
  silkscreen extent -0.7,-1.5 0.7,1.5
SOT-353_L2.1-W1.3-P0.65-LS2.3-BR [mm]
  rect 0.839x0.315 smd paste+0 mask+0.051: 1(0.844,-0.65) 2(0.844,0) 3(0.844,0.65) 4(-0.844,0.65) 5(-0.844,-0.65)
  silkscreen extent -0.7,-1.1 1.88,1.1
TDFN-8_L3.0-W3.0-P0.65-BL-EP [mm]
  oval 0.35x0.84 smd paste+0 mask+0.051: 1(-0.975,-1.495) 2(-0.325,-1.495) 3(0.325,-1.495) 4(0.975,-1.495) 5(0.975,1.495) 6(0.325,1.495) 7(-0.325,1.495) 8(-0.975,1.495)
  rect 2.4x1.6 smd paste+0 mask+0.051: 9(0,0)
  silkscreen extent -1.58,-2.5 1.58,1.58
TF-SMD_TF-01A [mm]
  rect 0.6x1.3 smd paste+0 mask+0.051: 1(2.301,5.276) 2(1.201,5.276) 3(0.101,5.276) 4(-0.999,5.276) 5(-2.099,5.276) 6(-3.199,5.276) 7(-4.299,5.276) 8(-5.399,5.276) 9(-6.499,5.276)
  rect 1.2x1.4 smd paste+0 mask+0.051: 10(-7.599,4.426) 13(7.081,4.426)
  rect 1.2x2 smd paste+0 mask+0.051: 11(-7.76,-5.276) 12(7.76,-5.276)
  round 1 hole 1 unplated paste+0: ""(-4.95,-5.478) ""(3.05,-5.475)
  silkscreen extent -7.37,-9.56 7.37,4.97
TSOP-6_L3.0-W1.5-P0.95-LS2.8-BR [mm]
  rect 1x0.7 smd paste+0 mask+0.051: 1(1.2,-0.95) 2(1.2,0) 3(1.2,0.95) 4(-1.2,0.95) 5(-1.2,0) 6(-1.2,-0.95)
  silkscreen extent -0.9,-1.94 1.88,1.6

## Free pads (board coordinates)
  round 125.98 hole 86.61 paste+0 mask+2: 1(2602.36,3390.74) 1(3232.28,2288.38) 1(3232.28,2918.3) 1(4492.12,2288.38) 1(4492.12,2918.3) 1(5122.04,3390.74)
  round 39.37 smd paste+0 mask+2: 2(3783.46,2150.59) 2(3940.94,3095.47) 2(3940.94,3174.21) 2(4452.74,1914.39) 2(4531.49,1914.37) 2(4846.45,2721.45)

## Via types
v1: diameter 17.72, hole 7.87, Top Layer to Bottom Layer, 281 vias

## Nets (pads, with @x,y where several pads share a name; then routed paths per layer and width w, separated by ;. In a path a pad name is that pad's centre, name@x,y a point inside that pad or via, vN(x,y) a via of type N, cw(c..) or ccw(c..) an arc to the next point about the centre after c; other vN are vias at no path point)
0V85: C7.2 C8.2 C9.2 C10.2 C11.2 C12.2 C19.2 C20.2 C23.2 C24.2 C25.2 pad.2@4846.45,2721.45 R19.2 U1.A7 U1.E7 U1.E8 U1.E9 U1.E10 U1.E11 U1.E12 U1.F7 U1.F8 U1.F9 U1.F10 U1.F11 U1.F12 U1.H7 U1.H8 U1.J7 U1.J9 U1.J10 U1.J12 U1.L7 U1.L12 U1.M7 U1.M8 U1.M11 U1.M12 U1.P7 U1.P8 U1.P9 U1.P10 U1.P11 U1.P12 U6.8 | length 648.2
  Top Layer w5.91: v1(4856.29,2460.62) 4856.29,2446.71 C23.2@4857.13,2445.86 ; v1(4856.29,2529.52) v1(4856.29,2559.04)
  Top Layer w11.81: v1(4836.61,2908.46) 4847.4,2919.26 U6.8
  Top Layer w19.68: R19.2@4765.07,2839.56 v1(4807.08,2839.56) C19.2@4849.09,2839.56 ; v1(4836.61,2888.77) v1(4836.61,2908.46) v1(4836.61,2888.77) ; C24.2 4857.13,2656.63 v1(4856.29,2657.47) 4846.45,2667.32 4846.45,2721.45 4846.45,2777.87 C20.2 4846.45,2783.14 v1(4846.45,2810.03) 4846.45,2836.93 C19.2@4849.09,2839.57 ; v1(4836.61,2869.09) v1(4836.61,2888.77) ; v1(4836.61,2869.09) v1(4836.61,2888.77) ; v1(4836.61,2869.09) 4849.1,2856.61 C19.2
  Top Layer w39.37: v1(4856.29,2460.62) v1(4856.29,2529.52) ; v1(4856.29,2559.04) v1(4856.29,2657.47)
  other v1: 3763.78,2426.17 3803.15,2426.17 3842.52,2426.17 3881.89,2426.17 3921.26,2426.17 3960.63,2426.17 4856.29,2431.1 3763.78,2504.91 3803.15,2504.91 3921.26,2504.91 3960.63,2504.91 3763.78,2544.28 3960.63,2544.28 3763.78,2623.02 3842.52,2623.02 3881.89,2623.02 3960.63,2623.02 4856.29,2627.95 3763.78,2662.39 3803.15,2662.39 3763.78,2741.13 3803.15,2741.13 3842.52,2741.13 3881.89,2741.13 3921.26,2741.13 3960.63,2741.13 3763.78,2780.5 3803.15,2780.5 3842.52,2780.5 3881.89,2780.5 3921.26,2780.5 3960.63,2780.5 3763.78,2937.98
1V8: C1.2 C2.2 C3.2 C4.2 C5.2 C6.2 C13.2 C16.2 C22.2 Q1.2 Q2.2 R3.2 R6.2 R8.2 R17.2 U1.H9 U1.H10 U1.H11 U1.H12 U1.H18 U1.J8 U1.J11 U1.K18 U1.L9 U1.L10 U1.L11 U1.M18 U2.5 U4.251 U4.253 U4.255 U4.257 U4.259 U5.5 U5.6 X1.1 X1.4 | length 851.1
  Top Layer w5.91: U5.5 v1(3419.29,3146.64) ; U5.6 3403.58,3162.35 v1(3419.29,3146.64) ; C16.2 v1(3419.29,3146.64) ; C2.2 3736.88,2044.96 v1(3744.07,2052.16) 3813,2052.14 3828.7,2036.44 U2.5 ; X1.1@4096.45,3223.43 X1.1@4096.45,3233.26 ; C6.2 4189.65,3380.9 v1(4238.18,3380.89) ; Q1.2@4238.2,3233.24 4211.6,3233.24 4196.8,3218.54 4196.8,3174.24 4246.1,3125.04 C13.2 ; R8.2@4430.42,3420.27 v1(4430.42,3459.64) ; v1(4698.81,2780.5) R17.2
  Top Layer w9.84: C1.2@4076.1,3331.64 4076.1,3304.84 4098.4,3282.44 4098.42,3225.39 X1.1@4096.45,3223.43 ; X1.4@4096.45,3164.36 X1.1@4096.45,3223.42
  other v1: 5072.83,1806.1 5092.51,1806.1 5112.2,1806.1 5072.83,1825.78 5092.51,1825.78 5112.2,1825.78 4972.74,2332.66 4974.4,2362.2 4196.85,2504.91 3842.52,2544.28 3881.89,2544.28 3921.26,2544.28 4196.85,2583.65 3803.15,2623.02 3921.26,2623.02 3842.52,2662.39 3881.89,2662.39 3921.26,2662.39 3960.63,2662.39 4196.85,2662.39 4238.18,3233.25 4430.42,3243.1 4098.42,3282.47 4728.34,3285.12
3V3: C14.2 C15.2 C17.2 C18.2 CARD1.4 R18.2 R21.2 R22.2 U3.8 U4.252 U4.254 U4.256 U4.258 U4.260 U5.16 U6.1 U6.2 U6.3 | length 694.3
  Top Layer w5.91: v1(2976.38,2957.65) CARD1.4@3036.46,2957.65 ; C15.2 3215.24,3147.33 v1(3222.44,3154.52) 3230.31,3146.63 U5.16 ; U3.8@4645.9,3163.44 4668.4,3163.44 4701.5,3196.54 v1(4728.34,3196.53) ; v1(4698.81,2721.45) R18.2@4730.98,2721.45 ; R22.2@4730.98,3075.78 4730.98,3068.22 4765.07,3034.13 4765.07,3016.72 v1(4797.24,3016.72)
  Top Layer w11.81: U6.3@4977.36,2967.52 5003.93,2967.52 v1(5023.61,2947.83) ; U6.1 4985.01,2918.3 v1(5023.61,2918.3) ; U6.2@4984.06,2944.85 4987.04,2947.83 v1(5023.61,2947.83) ; C17.2@5001.29,2780.5 5001.29,2839.56 5023.61,2861.89 v1(5023.61,2888.77) v1(5023.61,2918.3) ; v1(5023.61,2918.3) v1(5023.61,2947.83)
  other v1: 5142.71,1806.11 5161.41,1806.1 5181.1,1806.1 5142.71,1825.79 5161.41,1825.78 5181.1,1825.78
20MHZ_CYRSTAL: pad.2@3940.94,3174.21 R1.2 X1.3 | length 171.4
  Top Layer w5.91: R1.2 3940.94,3174.2 4011.81,3174.2 X1.3@4021.65,3164.37
BOOT_SEL: R12.1 U1.T10 U4.240 | length 1607.3
  Top Layer w5.91: v1(4979.32,2022.63) 4984.25,2027.56 R12.1
  Mid-Layer 1 w5.91: v1(3881.89,2347.43) 3901.6,2367.14 4634.8,2367.14 v1(4979.32,2022.63)
  Bottom Layer w5.91: U4.240 v1(4979.32,2022.63)
C21_2: C21.2 U6.6 | length 106.6
  Top Layer w5.91: C21.2 4816.89,2957.64 4829.69,2970.44 U6.6
CARD1_2: CARD1.2 U5.19 | length 374.1
  Top Layer w5.91: CARD1.2@3036.5,2871.04 3076.7,2871.04 3109.2,2903.54 3109.2,2972.44 3236.2,3099.44 U5.19
CARD1_3: CARD1.3 U5.18 | length 351.1
  Top Layer w5.91: CARD1.3@3036.5,2914.34 3075.8,2914.34 3089.6,2928.14 3089.6,2977.34 3227.4,3115.14 U5.18
CARD1_5: CARD1.5 U5.17 | length 293
  Top Layer w5.91: CARD1.5@3036.5,3000.94 3088.6,3000.94 3218.5,3130.94 U5.17
CARD1_7: CARD1.7 U5.20 | length 286.1
  Top Layer w5.91: CARD1.7@3036.46,3087.57 3038.41,3085.63 v1(3114.17,3085.62) ; v1@3232.3,3046.24 3232.3,3070.84 3245.1,3083.64 U5.20
  Bottom Layer w5.91: v1(3114.17,3085.62) 3153.54,3046.26 v1(3232.28,3046.25)
DEBUG_CLK: U1.A9 U4.210 | length 1973.5
  Top Layer w5.91: U1.A9@3842.5,2937.94 3842.5,2957.64 3921.3,3036.45 4275.6,3036.45 4374,2938.04 v1(4374.01,2445.86)
  Bottom Layer w5.91: v1@4374,2445.84 4374,2130.94 4684,1820.84 U4.210
GND: C1.1 C2.1 C3.1 C4.1 C5.1 C6.1 C7.1 C8.1 C9.1 C10.1 C11.1 C12.1 C13.1 C14.1 C15.1 C16.1 C17.1 C18.1 C19.1 C20.1 C21.1 C22.1 C23.1 C24.1 C25.1 CARD1.6 CARD1.10 CARD1.11 CARD1.12 CARD1.13 LED1.2 LED2.2 Q1.5 Q2.5 Q3.2 R5.1 R7.1 R10.1 R11.2 R12.2 R13.2 R14.2 R15.2 R16.2 R20.1 U1.B2 U1.B5 U1.B8 U1.B11 U1.B14 U1.B15 U1.D1 U1.D2 U1.D3 U1.D7 U1.D8 U1.D9 U1.D10 U1.D11 U1.D12 U1.D16 U1.E3 U1.E5 U1.E14 U1.E16 U1.E17 U1.E18 U1.F1 U1.F2 U1.F3 U1.F16 U1.G3 U1.G7 U1.G8 U1.G9 U1.G10 U1.G11 U1.G12 U1.G16 U1.G17 U1.G18 U1.H1 U1.H2 U1.H3 U1.H5 U1.H14 U1.H16 U1.H17 U1.J3 U1.J16 U1.J17 U1.J18 U1.K1 U1.K2 U1.K3 U1.K7 U1.K8 U1.K9 U1.K10 U1.K11 U1.K12 U1.K16 U1.L3 U1.L5 U1.L14 U1.L16 U1.L17 U1.L18 U1.M1 U1.M2 U1.M3 U1.M16 U1.N3 U1.N7 U1.N8 U1.N9 U1.N10 U1.N11 U1.N12 U1.N16 U1.N17 U1.N18 U1.P1 U1.P2 U1.P3 U1.P5 U1.P14 U1.P16 U1.R3 U1.R7 U1.R8 U1.R9 U1.R10 U1.R11 U1.R12 U1.R16 U1.R17 U1.R18 U1.U2 U1.U5 U1.U8 U1.U11 U1.U14 U1.U17 U2.3 U3.4 U4.1 U4.2 U4.3 U4.4 U4.7 U4.8 U4.10 U4.13 U4.14 U4.19 U4.20 U4.25 U4.26 U4.31 U4.32 U4.37 U4.38 U4.40 U4.43 U4.44 U4.46 U4.49 U4.50 U4.55 U4.56 U4.58 U4.61 U4.62 U4.64 U4.67 U4.68 U4.73 U4.74 U4.79 U4.80 U4.85 U4.86 U4.102 U4.107 U4.113 U4.119 U4.125 U4.129 U4.132 U4.135 U4.138 U4.141 U4.144 U4.146 U4.147 U4.152 U4.153 U4.158 U4.159 U4.164 U4.165 U4.170 U4.171 U4.176 U4.177 U4.200 U4.201 U4.217 U4.231 U4.241 U4.242 U4.243 U4.244 U4.245 U4.246 U4.247 U4.248 U4.249 U4.250 U5.15 U6.4 U6.9 X1.2
  other v1: 3901.57,1855.31 3074.8,1874.99 3138.78,1874.99 3212.6,1874.99 5023.61,1874.99 5043.3,1874.99 2838.58,1894.68 2897.64,1894.68 2961.61,1894.68 3020.67,1894.68 3311.02,1894.68 3783.46,1894.68 4255.9,1894.68 4570.86,1894.68 4925.19,1894.68 5023.61,1894.68 5043.3,1894.68 5023.61,1914.36 5043.3,1914.36 2759.84,1943.89 2602.36,1973.42 4688.97,2101.37 3744.09,2111.21 2838.58,2209.64 3153.54,2209.64 4649.6,2209.64 4807.08,2288.38 3566.93,2308.06 3685.04,2308.06 3803.15,2308.06 3921.26,2308.06 4039.37,2308.06 4157.48,2308.06 4807.08,2367.12 3803.15,2386.8 3921.26,2386.8 4118.11,2386.8 4196.85,2386.8 3527.56,2426.17 3606.3,2426.17 3685.04,2426.17 4039.37,2426.17 4570.86,2445.86 4728.34,2445.86 3803.15,2465.54 3921.26,2465.54 4118.11,2465.54 4196.85,2465.54 3527.56,2504.91 3606.3,2504.91 4196.85,2541.64 3685.04,2544.28 4039.37,2544.28 4118.11,2544.28 3527.56,2583.65 3606.3,2583.65 3803.15,2583.65 3921.26,2583.65 2759.84,2603.34 3311.02,2603.34 4118.11,2623.02 4196.85,2623.02 4452.75,2642.72 3527.56,2662.39 3606.3,2662.39 3685.04,2662.39 4039.37,2662.39 3074.8,2682.08 4570.86,2682.08 3803.15,2701.76 3921.26,2701.76 4118.11,2701.76 4196.85,2701.76 3527.56,2741.13 3606.3,2741.13 3685.04,2780.5 4039.37,2780.5 4118.11,2780.5 4196.85,2780.5 3527.56,2819.87 3606.3,2819.87 3803.15,2819.87 3921.26,2819.87 3566.93,2898.61 3685.04,2898.61 3803.15,2898.61 3921.26,2898.61 4078.74,2898.61 4649.6,2918.3 2917.32,2997.04 5043.3,2997.04 4472.44,3016.72 5003.93,3036.41 2917.32,3075.78 4570.85,3134.85 4177.16,3302.16 2838.58,3312 3862.2,3312 3940.94,3312 4964.56,3312 4492.12,3459.64 4177.16,3469.48
GPIO_PA0: U1.V13 U4.87 | length 1173.9
  Top Layer w5.91: v1(3384.84,1855.31) 3394.7,1845.44 U4.87 ; U1.V13@4000,2268.64 4000,2234.24 v1(4073.81,2160.43)
  Mid-Layer 1 w5.91: v1(3384.84,1855.31) 3793.27,1855.31 v1(3891.73,1953.73)
  Bottom Layer w5.91: v1(3891.73,1953.73) 3999.99,1953.74 4073.81,2027.55 v1(4073.81,2160.43)
GPIO_PA1: U1.U13 U4.118 | length 856.1
  Top Layer w5.91: U1.U13@4000,2308.04 3980.3,2288.34 3980.3,2219.54 v1(4039.37,2160.43)
  Bottom Layer w5.91: U4.118 3699.8,1850.44 3832.6,1983.24 3990.1,1983.24 4039.4,2032.44 v1(4039.37,2160.43)
GPIO_PA2: U1.T13 U4.124 | length 906
  Top Layer w5.91: U1.T13 4019.7,2327.74 4019.7,2248.99 v1(4108.26,2160.43)
  Bottom Layer w5.91: U4.124@3758.9,1717.54 3758.9,1820.94 3862.2,1924.24 4009.8,1924.24 4108.3,2022.64 v1(4108.26,2160.43)
GPIO_PA3: U1.C14 U4.126 | length 1675.1
  Top Layer w5.91: U1.C14 4059.1,2878.94 4236.2,2878.94 4275.6,2839.54 v1(4275.6,2161.5)
  Bottom Layer w5.91: U4.126 3778.5,1801.14 3872,1894.64 4019.7,1894.64 4275.6,2150.64 v1(4275.6,2161.5)
I2C0_SCL: Q2.3 Q2.6 R8.1 U4.185 | length 2188.6
  Top Layer w5.91: Q2.3@4238.2,3343.54 4267.7,3343.54 4285.4,3361.24 4285.4,3400.54 4303.1,3418.34 v1(4332.67,3418.29) ; v1(4332.67,3418.29) 4394.36,3418.3 R8.1@4396.34,3420.27 ; v1@4334.6,1894.64 4344.5,1894.64 4438,1801.14 U4.185
  Bottom Layer w5.91: v1(4332.67,3418.29) 4425.2,3418.34 4541.3,3302.14 4541.3,3134.84 4344.5,2937.94 4344.5,1904.54 v1@4334.6,1894.64
  other v1: 4334.64,1894.68
I2C0_SCL_INV: R9.1 R10.2 U1.B12 U3.3 | length 923
  Top Layer w5.91: R9.1 4430.42,3302.16 4521.6,3302.14 4545.9,3326.34 U3.3@4545.9,3381.74
  Bottom Layer w5.91: v1(3960.63,2898.61) 3960.63,2977.36 3999.99,3016.73 4144.98,3016.73 v1(4430.4,3302.14)
I2C0_SDA: Q1.3 Q1.6 R3.1 U4.187 | length 2190.8
  Top Layer w5.91: Q1.3@4238.2,3195.84 4267.7,3195.84 4285.4,3213.54 4285.4,3252.94 4303.1,3270.64 4332.7,3270.64 4356.3,3270.64 4383.9,3243.14 R3.1 ; v1@4305.1,1934.04 4364.1,1934.04 4457.7,1840.54 U4.187
  Bottom Layer w5.91: v1@4305.1,1934.04 4315,1943.94 4315,2947.84 4511.8,3144.64 4511.8,3272.64 4452.7,3331.64 4393.7,3331.64 v1@4332.7,3270.64
  other v1: 4305.11,1934.05 4332.67,3270.65
I2C0_SDA_INV: R4.1 R5.2 U1.A14 U3.5 | length 601.6
  Top Layer w5.91: v1(4430.42,3124.99) 4430.42,3184.05 4452.8,3184.04 4473.4,3163.44 U3.5@4495.9,3163.44
  Bottom Layer w5.91: v1(4039.37,2937.98) 4243.41,2937.98 v1(4430.42,3124.99)
I2C1_SCL: pad.2@4452.74,1914.39 U1.T11 U4.189 | length 935.2
  Top Layer w5.91: pad.2@4452.7,1914.34 4477.3,1889.74 U4.189
  Mid-Layer 1 w5.91: v1@4196.85,2160.43 4206.68,2160.43 v1(4452.75,1914.36)
  Bottom Layer w5.91: v1(3921.26,2347.43) 3940.9,2327.74 4059.1,2327.74 4196.9,2189.94 v1@4196.9,2160.44
  other v1: 4196.85,2160.43
I2C1_SDA: pad.2@4531.49,1914.37 U1.T12 U4.191 | length 978.7
  Top Layer w5.91: U4.191 4497,1879.94 pad.2@4531.5,1914.34
  Mid-Layer 1 w5.91: v1(4236.22,2160.43) 4482.29,1914.36 v1(4531.49,1914.36)
  Bottom Layer w5.91: v1(3960.63,2347.43) 4078.7,2347.44 4236.2,2189.94 v1(4236.22,2160.43)
JTAG_STATE0: U1.V12 U4.212 | length 1049.2
  Mid-Layer 1 w5.91: v1@3960.6,2268.64 3980.3,2249.04 4305.1,2249.04 v1(4629.92,1924.21)
  Bottom Layer w5.91: v1(4629.92,1924.21) 4703.7,1850.44 U4.212
  other v1: 3960.63,2268.69
JTAG_STATE1: U1.U10 U4.216 | length 1339
  Mid-Layer 1 w5.91: v1@3881.9,2308.04 3901.6,2327.74 4324.8,2327.74 4516.69,2135.86 4600.38,2052.16 v1(4757.87,2052.16)
  Bottom Layer w5.91: U4.216 4743.1,2037.34 v1@4757.9,2052.14
  other v1: 3881.89,2308.06
JTAG_STATE2: U1.U12 U4.218 | length 1297.6
  Mid-Layer 1 w5.91: v1@3960.6,2308.04 3980.3,2288.34 4315,2288.34 4659.4,1943.84 v1@4846.4,1943.84
  Bottom Layer w5.91: U4.218 4762.8,1860.24 v1@4846.4,1943.84
  other v1: 4846.45,1943.89 3960.63,2308.06
JTAG_STATE3: U1.V11 U4.228 | length 1306.7
  Mid-Layer 1 w5.91: v1@3921.3,2268.64 3970.5,2219.44 4285.4,2219.44 4610.2,1894.64 v1@4885.8,1894.64
  Bottom Layer w5.91: U4.228 4861.2,1870.04 v1@4885.8,1894.64
  other v1: 4885.82,1894.68 3921.26,2268.69
JTAG_TCK: R16.1 U1.C6 U4.41 | length 1672.6
  Top Layer w5.91: U4.41 2941.9,1938.94 2956.7,1953.74 2956.7,2333.54 3068.9,2445.84 3074.8,2445.84 3052.47,2468.19 R16.1@3052.47,2485.23
  Bottom Layer w5.91: v1@3074.8,2445.84 3507.9,2878.94 3704.7,2878.94 v1(3724.41,2859.24)
  other v1: 3074.8,2445.86
JTAG_TDI: U1.A5 U4.45 | length 1702.2
  Top Layer w5.91: U4.45 v1(2981.3,2199.8) ; v1(3655.51,2997.04) 3685.04,2967.52 U1.A5
  Bottom Layer w5.91: v1(2981.3,2199.8) 2981.3,2445.85 3532.5,2997.05 v1(3655.51,2997.04)
JTAG_TDO: U1.C5 U4.47 | length 1511.5
  Top Layer w5.91: U4.47 3001,2145.64 3094.5,2239.14 v1@3094.5,2396.64
  Bottom Layer w5.91: v1@3094.5,2396.64 3094.5,2416.34 3537.4,2859.24 v1(3685.04,2859.24)
  other v1: 3094.49,2396.65
JTAG_TMS: U1.A6 U4.39 | length 1828.4
  Top Layer w5.91: U4.39 v1(2922.24,2440.94) ; v1(3704.72,2997.04) 3724.4,2977.36 U1.A6@3724.4,2937.94
  Bottom Layer w5.91: v1(2922.24,2440.94) 2922.24,2441.69 3507.1,3026.55 3675.2,3026.55 v1(3704.72,2997.04)
JTAG_TRST: U1.B6 U4.51 | length 1624.9
  Top Layer w5.91: U4.51 v1@3040.3,2121.04
  Bottom Layer w5.91: v1(3040.35,2121.06) 3040.35,2460.69 3045.3,2465.64 3498,2918.34 3704.7,2918.34 v1(3724.41,2898.61)
LED2_1: LED2.1 R18.1 | length 422.3
  Top Layer w5.91: R18.1@4765.07,2721.45 v1(4797.24,2721.45) ; LED2.1 5092.51,2876.97 v1(5092.51,2829.72)
  Bottom Layer w5.91: v1(4797.24,2721.45) 4984.24,2721.45 v1(5092.51,2829.72)
LED3_2: LED3.2 Q3.3 | length 271.3
  Top Layer w5.91: Q3.3 4998,3160.44 5013.8,3144.64 5131.8,3144.64 5153.5,3166.34 LED3.2
Q1_1: Q1.1 U3.7 | length 422.9
  Top Layer w5.91: Q1.1@4236.21,3272.63 v1(4238.18,3270.65)
  Mid-Layer 1 w5.91: v1@4238.2,3270.64 4259.8,3292.34 4359.2,3292.34 4378.9,3272.64 4486.7,3272.64 v1@4595.9,3163.44
  other v1: 4595.86,3163.48
Q2_1: Q2.1 U3.1 | length 440.7
  Mid-Layer 1 w5.91: v1(4238.18,3418.29) 4260,3439.94 4587.7,3439.94 v1@4645.9,3381.74
  other v1: 4645.86,3381.78
QSPI0_CS: U1.T9 U4.227 | length 1402.4
  Top Layer w5.91: v1(4019.68,2086.61) 4625,2086.64 4851.4,1860.24 U4.227
  Bottom Layer w5.91: v1(3842.52,2347.43) 3842.5,2308.04 4019.68,2130.86 v1(4019.68,2086.61)
QSPI0_DQ0: U2.4 U4.219 | length 1200.7
  Top Layer w5.91: U2.4@3777.56,2018.93 3777.56,1984.25 v1(3778.54,1983.26) ; v1@3778.5,1983.24 4610.2,1983.24 4772.6,1820.84 U4.219
QSPI0_DQ0_INV: pad.2@3783.46,2150.59 U1.V9 U2.2 | length 229.8
  Top Layer w5.91: v1(3783.46,2150.58) 3803.15,2130.89 U2.2@3803.15,2085.41 ; U1.V9 3842.52,2219.48 v1(3852.36,2209.64)
  Bottom Layer w5.91: v1(3783.46,2150.58) 3842.52,2209.64 v1(3852.36,2209.64)
QSPI0_DQ1: U1.T8 U4.221 | length 1431.7
  Top Layer w5.91: v1@3950.8,2002.94 4620.1,2002.94 4792.3,1830.74 U4.221
  Bottom Layer w5.91: v1@3803.1,2347.44 3822.8,2327.74 3822.8,2288.41 3911.41,2199.8 3911.41,2042.32 v1(3950.78,2002.95)
  other v1: 3803.15,2347.43
QSPI0_DQ2: U1.U9 U4.223 | length 1366.8
  Top Layer w5.91: U1.U9@3842.5,2308.04 3862.2,2288.34 3862.2,2249.01 v1(3940.94,2170.27) ; v1@3980.3,2032.44 4620.1,2032.44 4812,1840.54 U4.223
  Bottom Layer w5.91: v1(3940.94,2170.27) 3980.31,2130.91 v1(3980.31,2032.47)
QSPI0_DQ3: U1.V8 U4.225 | length 1406.8
  Top Layer w5.91: U1.V8@3803.1,2268.64 3803.1,2224.45 3886.81,2140.74 v1(3940.94,2140.74) ; v1(3940.94,2062) 4620.1,2062.04 4831.7,1850.44 U4.225
  Bottom Layer w5.91: v1(3940.94,2062) v1(3940.94,2140.74)
QSPI0_SCLK: U1.V7 U4.229 | length 1447.9
  Top Layer w5.91: U1.V7@3763.8,2268.64 3763.8,2229.34 3881.9,2111.24 4629.9,2111.24 4871,1870.14 U4.229
R4_2: Q1.4 R4.2 | length 68.5
  Top Layer w5.91: Q1.4@4332.7,3195.84 4362.2,3195.84 4374,3184.04 R4.2@4396.3,3184.04
R9_2: Q2.4 R9.2 | length 70.9
  Top Layer w5.91: Q2.4@4332.7,3343.54 4356.3,3343.54 4374,3361.24 R9.2@4396.3,3361.24
R17_1: LED1.1 R17.1 | length 440.1
  Top Layer w5.91: R17.1@4765.07,2780.5 v1(4797.24,2780.5) ; v1(5043.3,3036.41) LED1.1
  Bottom Layer w5.91: v1(4797.24,2780.5) 4797.2,2795.24 5038.4,3036.44 v1(5043.3,3036.41)
R20_2: R19.1 R20.2 U6.7 | length 193.6
  Top Layer w5.91: R19.1@4730.98,2839.56 4730.98,2852.05 4765.06,2886.13 R20.2@4765.06,2898.62 ; R20.2 4777.6,2898.64 4823.8,2944.84 U6.7
R21_1: LED3.1 R21.1 | length 578.3
  Top Layer w5.91: R21.1 4708.7,3016.74 4689,3036.44 4689,3085.64 4836.6,3233.24 5051.2,3233.24 LED3.1
R22_1: Q3.1 R22.1 U6.5 | length 285.3
  Top Layer w5.91: R22.1@4765.06,3075.78 4881.89,3075.78 Q3.1 ; U6.5 4847.5,2996.04 4836.6,3006.84 4836.6,3075.74 4887.8,3075.74 Q3.1@4887.8,3069.84
RESET: R11.1 U1.V10 U4.239 | length 1519.7
  Top Layer w5.91: U1.V10@3881.9,2268.64 4014.8,2135.84 4782.5,2135.84 4866.1,2052.14 4969.5,1948.84 U4.239 ; v1(4866.14,2052.16) 4888.48,2074.5 R11.1
S$12913: 
S$25875: 
SPI1_CS: U1.B13 U4.95 U5.2 | length 2305.9
  Top Layer w5.91: U5.2 3380.9,3099.44 3409.4,3070.84 3409.4,2750.94 3375,2716.54 3375,2618.14 v1@3409.4,2583.64 ; v1(3468.5,1934.05) 3493.11,1909.45 3493.11,1879.92 3473.42,1860.23 U4.95
  Mid-Layer 1 w5.91: v1@3409.45,2583.65 3409.45,2180.09 3468.5,2121.04 v1(3468.5,1934.05) ; v1(3409.45,2583.65) 3586.6,2760.84 3980.3,2760.84 4019.7,2800.24 4019.7,2878.95 v1(4000,2898.61)
SPI1_MISO: U1.A13 U4.93 U5.1 | length 2409.2
  Top Layer w5.91: U5.1 3372.1,3083.64 3379.9,3075.74 3379.9,2770.64 3355.3,2746.04 3355.3,2598.34 3409.4,2544.24 v1@3448.8,2544.24 ; U4.93 3453.73,1879.91 v1(3468.5,1894.68)
  Mid-Layer 1 w5.91: v1@3448.8,2544.25 3448.8,2209.64 3498,2160.44 3498,1924.19 v1(3468.5,1894.68) ; v1(3448.82,2544.28) 3626,2721.45 4019.7,2721.45 4059.1,2760.84 4059.1,2878.84 v1@4000,2937.94
  other v1: 4000,2937.98
SPI1_MOSI: U1.C13 U4.89 U5.3 | length 2219.7
  Top Layer w5.91: U5.3 3389.8,3115.14 3439,3065.94 3439,2731.34 v1(3399.6,2691.92) ; v1(3389.76,1894.68) 3414.36,1870.08 U4.89
  Mid-Layer 1 w5.91: v1(3389.76,1894.68) 3360.23,1924.21 3360.23,2652.56 v1(3399.6,2691.92) 3399.6,2721.44 3517.7,2839.54 3822.8,2839.54 3862.2,2878.94 3980.3,2878.94 v1(4000,2859.24)
SPI1_SCLK: U1.C12 U4.91 U5.4 | length 2196.2
  Top Layer w5.91: U5.4 3398.6,3130.94 3468.5,3061.04 3468.5,2721.44 v1@3399.6,2652.54 ; v1(3434.05,1894.68) 3434.05,1717.59 U4.91@3434.1,1717.54
  Mid-Layer 1 w5.91: v1(3434.05,1894.68) 3434.05,2096.39 3384.8,2145.64 3384.8,2637.74 3399.6,2652.54 v1(3399.6,2652.55) 3547.2,2800.24 3852.4,2800.24 3911.4,2859.25 v1(3960.63,2859.24)
SYS_CLK: R1.1 R2.1 U1.C8 | length 330.8
  Top Layer w5.91: R2.1@3791.3,3095.44 3783.5,3095.44 3783.5,2878.94 U1.C8 ; R2.1 R1.1
SYS_CLK_EXT: pad.2@3940.94,3095.47 R2.2 U4.214 | length 2094.2
  Top Layer w5.91: R2.2 pad.2@3940.94,3095.46 ; pad.2@3940.9,3095.44 3960.6,3075.74 4482.3,3075.74 4620.1,2937.94 v1@4620.1,2445.84
  Bottom Layer w5.91: v1@4620.1,2445.84 4723.4,2342.54 U4.214
  other v1: 4620.07,2445.86
TL_CLK: U1.T7 U4.12 | length 1508.5
  Bottom Layer w5.91: U4.12 2656.5,1801.24 2823.8,1968.54 3512.8,1968.54 3783.5,2239.14 3783.5,2327.74 v1(3763.78,2347.43)
TL_IN_DAT: U1.U7 U4.6 | length 1465.7
  Bottom Layer w5.91: U4.6 2597.4,1810.94 2809.1,2022.64 3478.4,2022.64 v1@3763.8,2308.04
  other v1: 3763.78,2308.06
TL_IN_RDY: U1.U6 U4.60 | length 997.7
  Top Layer w5.91: v1(3232.28,1934.05) 3291.34,1993.11 3537.4,1993.11 3744.09,2199.8 3744.09,2288.38 U1.U6
  Bottom Layer w5.91: U4.60 3128.9,1830.74 v1@3232.3,1934.04
TL_IN_VAL: R14.1 U1.V5 U4.48 | length 976
  Top Layer w5.91: v1(3143.7,1943.89) 3219.84,2020.03 R14.1 ; R14.1 3468.5,2052.14 U1.V5@3685,2268.64
  Bottom Layer w5.91: U4.48 3010.8,1781.44 3143.7,1914.34 v1@3143.7,1943.84
TL_OUT_DAT: U1.V6 U4.5 | length 1442.9
  Top Layer w5.91: U4.5 2587.6,1801.14 2779.5,1993.14 v1(2887.79,1993.1) ; v1(3714.56,2209.64) 3724.4,2219.48 U1.V6@3724.4,2268.64
  Bottom Layer w5.91: v1(2887.79,1993.1) 3498.02,1993.1 v1(3714.56,2209.64)
TL_OUT_RDY: R15.1 U1.T5 U4.66 | length 1007.7
  Top Layer w5.91: R15.1 v1(3311.02,2111.21)
  Mid-Layer 1 w5.91: v1(3311.02,1934.05) v1(3311.02,2111.21)
  Bottom Layer w5.91: U4.66 3188,1811.04 v1@3311,1934.04 ; v1(3311.02,2111.21) 3448.77,2111.21 v1(3685.04,2347.43)
TL_OUT_VAL: U1.T6 U4.42 | length 1122.8
  Top Layer w5.91: v1(3074.8,1914.36) 3163.37,1914.36 3271.66,2022.64 3478.3,2022.64 3704.7,2249.05 3704.7,2327.74 v1(3724.41,2347.43)
  Bottom Layer w5.91: U4.42 2951.8,1791.34 v1@3074.8,1914.34
UART0_RX: R13.1 U1.C7 U4.101 | length 1549.9
  Top Layer w5.91: U4.101 3532.5,1850.34 v1@3576.8,1894.64 ; v1(3576.77,1894.68) 3638.47,1956.39 R13.1
  Mid-Layer 1 w5.91: v1(3468.5,2278.54) 3576.77,2170.27 v1(3576.77,1894.68)
  Bottom Layer w5.91: v1(3468.5,2278.54) 3468.5,2642.74 3586.6,2760.84 3704.7,2760.84 3763.8,2819.84 v1(3763.78,2859.24)
UART0_TX: U1.B7 U4.99 | length 1459
  Top Layer w5.91: U4.99 3512.8,1879.94 v1@3527.6,1894.64
  Mid-Layer 1 w5.91: v1(3468.5,2239.17) 3527.56,2180.11 v1(3527.56,1894.68)
  Bottom Layer w5.91: v1@3468.5,2239.14 3429.1,2278.54 3429.1,2682.14 3547.3,2800.24 3704.8,2800.24 3744.1,2839.54 3744.1,2878.94 v1(3763.78,2898.61)
VREF: R6.1 R7.2 U3.2 U3.6 | length 426.7
  Top Layer w5.91: U3.6@4545.9,3163.44 4545.9,3267.34 4595.9,3317.34 ; U3.2@4595.9,3381.74 4595.9,3317.34 ; R7.2 R6.1 4597.76,3319.2 4595.9,3317.34
  other v1: 4595.86,3381.78
pads on no net: CARD1. CARD1.1 CARD1.8 CARD1.9 U1.A1 U1.A2 U1.A3 U1.A4 U1.A8 U1.A10 U1.A11 U1.A12 U1.A15 U1.A16 U1.A17 U1.A18 U1.B1 U1.B3 U1.B4 U1.B9 U1.B10 U1.B16 U1.B17 U1.B18 U1.C1 U1.C2 U1.C3 U1.C4 U1.C9 U1.C10 U1.C11 U1.C15 U1.C16 U1.C17 U1.C18 U1.D4 U1.D5 U1.D6 U1.D13 U1.D14 U1.D15 U1.D17 U1.D18 U1.E1 U1.E2 U1.E4 U1.E6 U1.E13 U1.E15 U1.F4 U1.F5 U1.F6 U1.F13 U1.F14 U1.F15 U1.F17 U1.F18 U1.G1 U1.G2 U1.G4 U1.G5 U1.G6 U1.G13 U1.G14 U1.G15 U1.H4 U1.H6 U1.H13 U1.H15 U1.J1 U1.J2 U1.J4 U1.J5 U1.J6 U1.J13 U1.J14 U1.J15 U1.K4 U1.K5 U1.K6 U1.K13 U1.K14 U1.K15 U1.K17 U1.L1 U1.L2 U1.L4 U1.L6 U1.L8 U1.L13 U1.L15 U1.M4 U1.M5 U1.M6 U1.M9 U1.M10 U1.M13 U1.M14 U1.M15 U1.M17 U1.N1 U1.N2 U1.N4 U1.N5 U1.N6 U1.N13 U1.N14 U1.N15 U1.P4 U1.P6 U1.P13 U1.P15 U1.P17 U1.P18 U1.R1 U1.R2 U1.R4 U1.R5 U1.R6 U1.R13 U1.R14 U1.R15 U1.T1 U1.T2 U1.T3 U1.T4 U1.T14 U1.T15 U1.T16 U1.T17 U1.T18 U1.U1 U1.U3 U1.U4 U1.U15 U1.U16 U1.U18 U1.V1 U1.V2 U1.V3 U1.V4 U1.V14 U1.V15 U1.V16 U1.V17 U1.V18 U2.1 U4. U4.9 U4.11 U4.15 U4.16 U4.17 U4.18 U4.21 U4.22 U4.23 U4.24 U4.27 U4.28 U4.29 U4.30 U4.33 U4.34 U4.35 U4.36 U4.52 U4.53 U4.54 U4.57 U4.59 U4.63 U4.65 U4.69 U4.70 U4.71 U4.72 U4.75 U4.76 U4.77 U4.78 U4.81 U4.82 U4.83 U4.84 U4.88 U4.90 U4.92 U4.94 U4.96 U4.97 U4.98 U4.100 U4.103 U4.104 U4.105 U4.106 U4.108 U4.109 U4.110 U4.111 U4.112 U4.114 U4.115 U4.116 U4.117 U4.120 U4.121 U4.122 U4.123 U4.127 U4.128 U4.130 U4.131 U4.133 U4.134 U4.136 U4.137 U4.139 U4.140 U4.142 U4.143 U4.145 U4.148 U4.149 U4.150 U4.151 U4.154 U4.155 U4.156 U4.157 U4.160 U4.161 U4.162 U4.163 U4.166 U4.167 U4.168 U4.169 U4.172 U4.173 U4.174 U4.175 U4.178 U4.179 U4.180 U4.181 U4.182 U4.183 U4.184 U4.186 U4.188 U4.190 U4.192 U4.193 U4.194 U4.195 U4.196 U4.197 U4.198 U4.199 U4.202 U4.203 U4.204 U4.205 U4.206 U4.207 U4.208 U4.209 U4.211 U4.213 U4.215 U4.220 U4.222 U4.224 U4.226 U4.230 U4.232 U4.233 U4.234 U4.235 U4.236 U4.237 U4.238 U5.7 U5.8 U5.9 U5.10 U5.11 U5.12 U5.13 U5.14
copper on no net: | length 0.1

## Polygon pours and split planes (outlines as drawn)
3V3 on Bottom Layer "Bottom Layer-3V3" (solid, pour order 0): 5062.98,1835.63 5062.98,1786.42 5092.51,1786.42 5092.51,1619.09 5181.1,1619.09 5181.1,1761.81 5240.15,1761.81 5240.15,1835.63
GND on Bottom Layer "Bottom Layer-GND" (solid, pour order 1): 2287.4,3705.7 2287.4,1761.81 6066.92,1761.81 6066.92,3705.7
GND on Mid-Layer 4 "Mid-Layer 4-GND" (solid, pour order 2): 2129.92,3705.7 2129.92,1500.98 5909.44,1500.98 5909.44,3705.7
0V85 on Mid-Layer 3 "Mid-Layer 3-0V85" (solid, pour order 3): 3704.72,2997.04 3704.72,2327.75 4885.82,2327.75 4885.82,2957.67 4728.34,2957.67 4728.34,2682.08 4334.64,2682.08 4334.64,2997.04
3V3 on Mid-Layer 3 "Mid-Layer 3-3V3" (solid, pour order 4): 1972.44,3705.7 1972.44,1500.98 5751.96,1500.98 5751.96,3705.7
1V8 on Mid-Layer 2 "Mid-Layer 2-1V8" (solid, pour order 5): 1814.96,3705.7 1814.96,1500.98 5594.48,1500.98 5594.48,3705.7
GND on Mid-Layer 1 "Mid-Layer 1-GND" (solid, pour order 6): 1657.48,3705.7 1657.48,1500.98 5437,1500.98 5437,3705.7
1V8 on Top Layer "Top Layer-1V8" (solid, pour order 7): 5062.98,1835.63 5062.98,1786.42 5077.75,1786.42 5077.75,1638.78 5171.25,1638.78 5171.25,1761.81 5259.84,1761.81 5259.84,1835.63
GND on Top Layer "Top Layer-GND" (solid, pour order 8): 1500,3705.7 1500,1761.81 5279.52,1761.81 5279.52,3705.7

## Keep-outs
Keep-Out Layer:
  lines w5.91: 3980.31,1796.26 cw(c3999.99,1796.26) 4019.68,1796.26

## Silkscreen, mask and mechanical layers (free items; w line width, h text height)
Top Overlay:
  text "0V85" at 5082.67,3233.26 h47.24
  text "USE_XTAL" at 3542.32,3159.44 h47.24
  text "USE_EXT" at 3566.93,3080.7 h47.24
  text "1V8" at 5107.28,3075.78 h47.24
  text "3V3" at 5107.28,2918.3 h47.24
  text "JLCJLCJLCJLC" at 2946.85,2711.61 h47.24 r90
  text "Caution" at 4457.67,2613.18 h47.24
  text "Hot Die Surface" at 4462.59,2563.97 h47.24
  text "UC Berkeley EE 194" at 2553.15,2258.85 h47.24 r359
  text "2022-12-20" at 2553.15,2199.8 h47.24
  text "SODIMM IO Level 1.8V" at 2553.15,2121.06 h47.24
  text "TF Card IO Level 3.3V" at 2553.15,2062 h47.24
  text "BearlyML Module Board" at 4078.74,2057.08 h62.99
  text "Rev2" at 4078.74,2002.95 h47.24 r359
Document:
  lines w1.97: 2366.14,1658.45 5358.26,1658.46 ; 2366.14,1815.94 5358.26,1815.96 ; 2366.14,3508.85 5358.26,3508.85 ; 2492.12,1500.98 2492.12,3626.96 ; 5232.28,1500.98 5232.28,3626.97